# EAGLE board ToF-Module-panelized (EAGLE 9.4.2), part 1 of 3
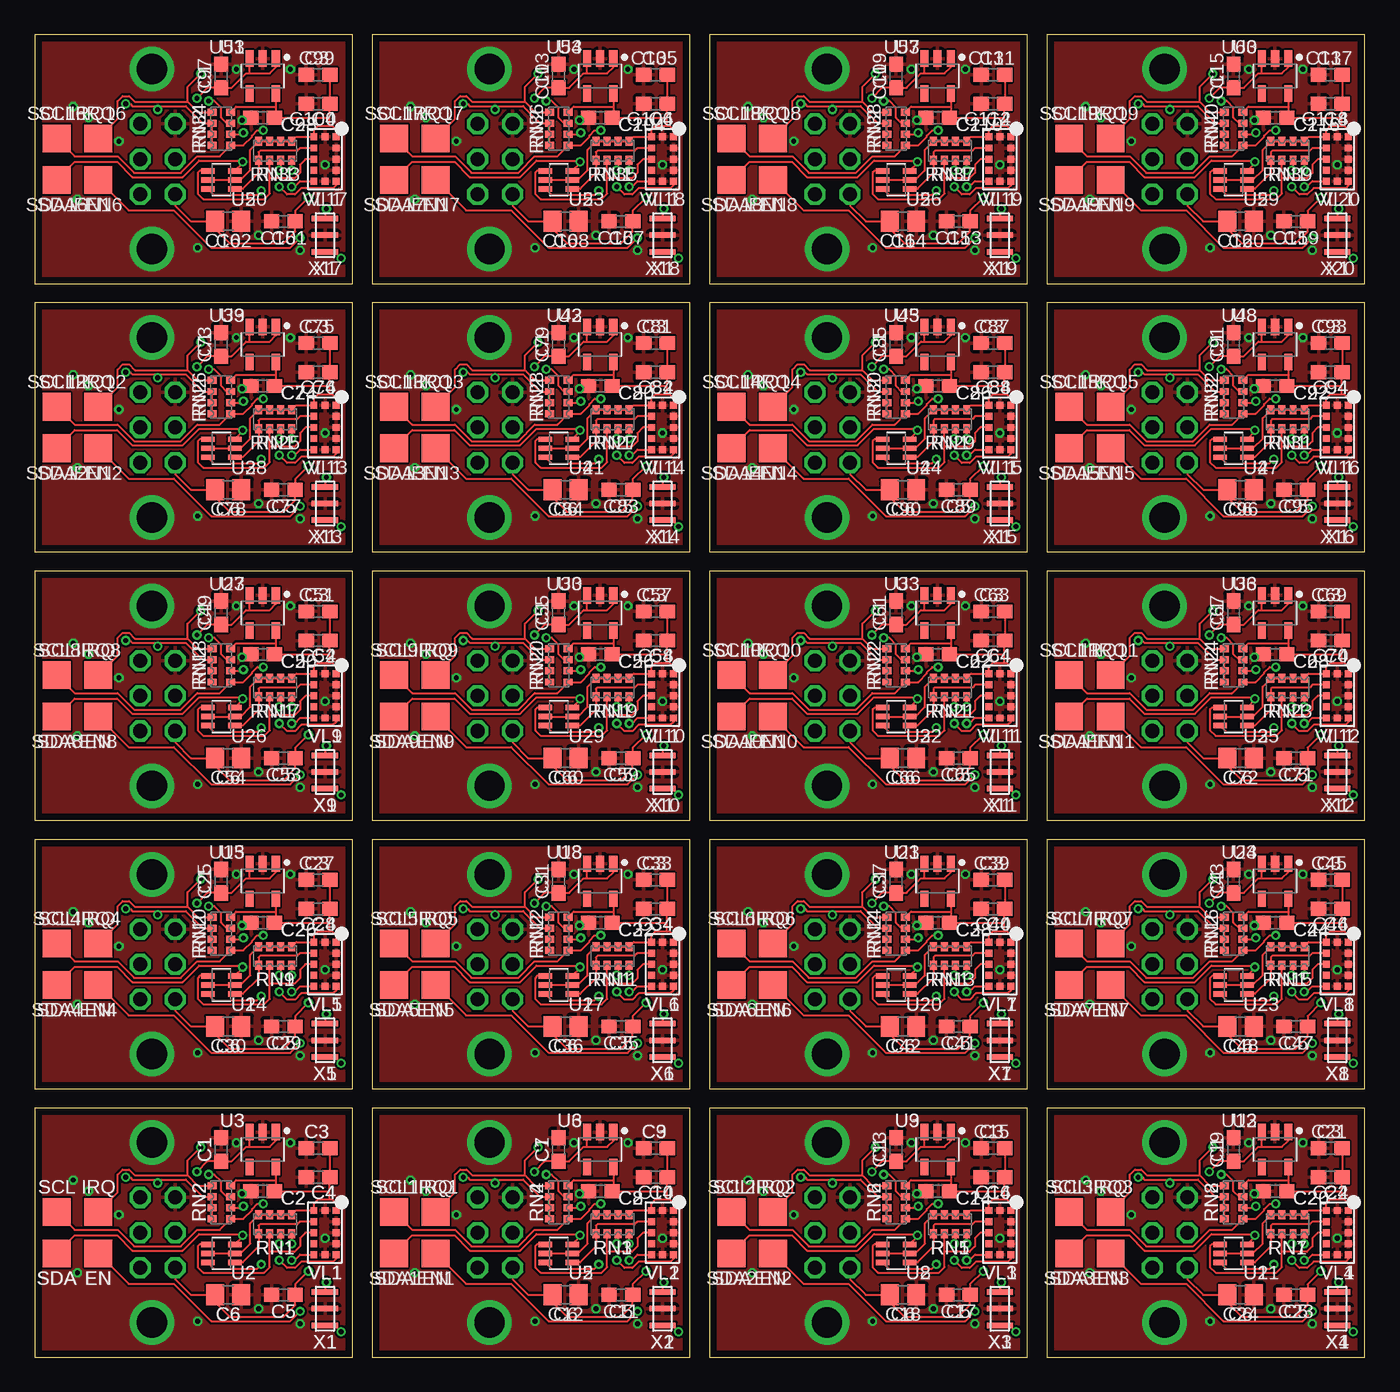
[diagram p0: board, top side]
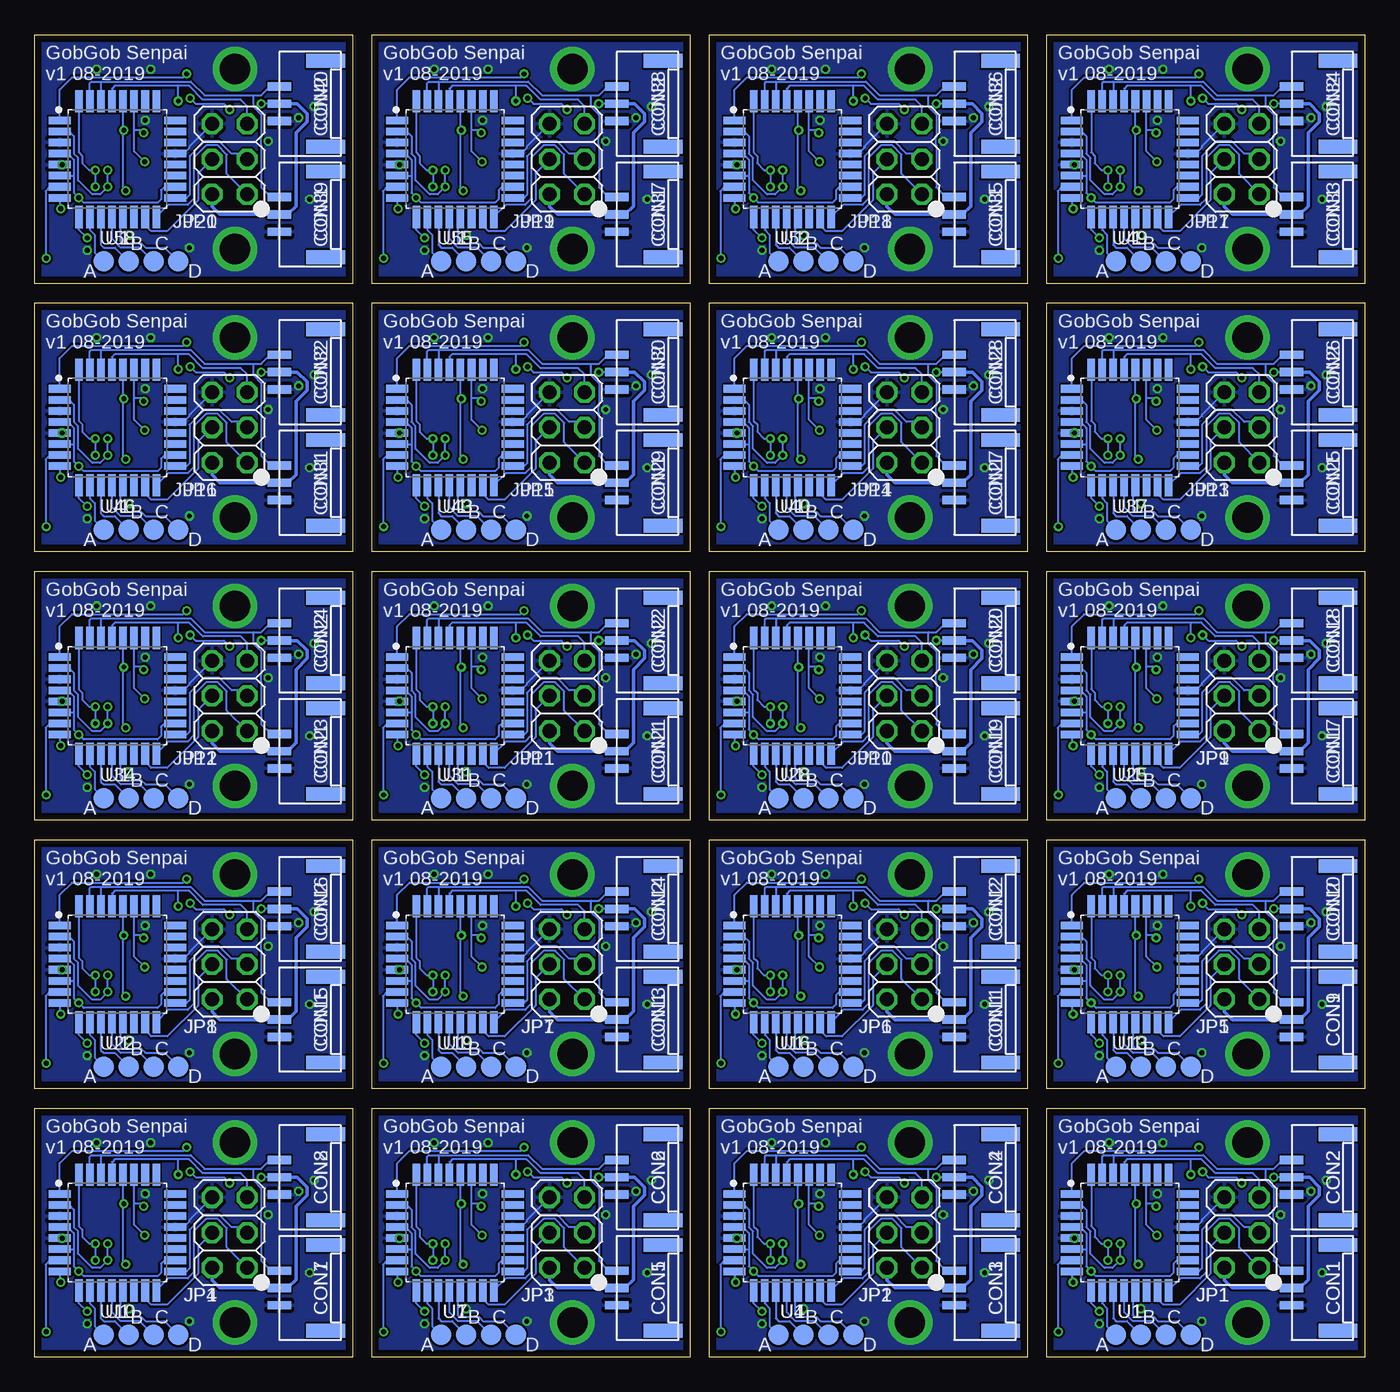
[diagram p1: board, bottom side, seen from below]

Size 96.2 x 95.6 mm. Coordinates in mm from the lower left corner, seen from the top.
Outline: 0,0 23,0 23,18 0,18 0,0
Outline: 24.4,0 47.4,0 47.4,18 24.4,18 24.4,0
Outline: 48.8,0 71.8,0 71.8,18 48.8,18 48.8,0
Outline: 73.2,0 96.2,0 96.2,18 73.2,18 73.2,0
Outline: 0,19.4 23,19.4 23,37.4 0,37.4 0,19.4
Outline: 24.4,19.4 47.4,19.4 47.4,37.4 24.4,37.4 24.4,19.4
Outline: 48.8,19.4 71.8,19.4 71.8,37.4 48.8,37.4 48.8,19.4
Outline: 73.2,19.4 96.2,19.4 96.2,37.4 73.2,37.4 73.2,19.4
Outline: 0,38.8 23,38.8 23,56.8 0,56.8 0,38.8
Outline: 24.4,38.8 47.4,38.8 47.4,56.8 24.4,56.8 24.4,38.8
Outline: 48.8,38.8 71.8,38.8 71.8,56.8 48.8,56.8 48.8,38.8
Outline: 73.2,38.8 96.2,38.8 96.2,56.8 73.2,56.8 73.2,38.8
Outline: 0,58.2 23,58.2 23,76.2 0,76.2 0,58.2
Outline: 24.4,58.2 47.4,58.2 47.4,76.2 24.4,76.2 24.4,58.2
Outline: 48.8,58.2 71.8,58.2 71.8,76.2 48.8,76.2 48.8,58.2
Outline: 73.2,58.2 96.2,58.2 96.2,76.2 73.2,76.2 73.2,58.2
Outline: 0,77.6 23,77.6 23,95.6 0,95.6 0,77.6
Outline: 24.4,77.6 47.4,77.6 47.4,95.6 24.4,95.6 24.4,77.6
Outline: 48.8,77.6 71.8,77.6 71.8,95.6 48.8,95.6 48.8,77.6
Outline: 73.2,77.6 96.2,77.6 96.2,95.6 73.2,95.6 73.2,77.6
Copper layers (1*16): Top 0.035mm / dielectric 1mm / Bottom 0.035mm
Design rules "Elecrow_2-layer_PCB_eagle_rule *": minimum track width 6mil, minimum drill 12mil, track to track 6mil, track to pad 6mil, pad to pad 6mil, via to via 8mil, smd to smd 0mil, copper to edge 20mil, drill to drill 10mil, minimum pad ring 6mil, minimum via ring 6mil, stop-mask expansion 0mil, vias tented up to drill 1mm, thermal gap 10mil
tKeepout: area 0,0 to 11,5; area 0,13 to 11,18; area 24.4,0 to 35.4,5; area 24.4,13 to 35.4,18; area 48.8,0 to 59.8,5; area 48.8,13 to 59.8,18; area 73.2,0 to 84.2,5; area 73.2,13 to 84.2,18; area 0,19.4 to 11,24.4; area 0,32.4 to 11,37.4; area 24.4,19.4 to 35.4,24.4; area 24.4,32.4 to 35.4,37.4; area 48.8,19.4 to 59.8,24.4; area 48.8,32.4 to 59.8,37.4; area 73.2,19.4 to 84.2,24.4; area 73.2,32.4 to 84.2,37.4; area 0,38.8 to 11,43.8; area 0,51.8 to 11,56.8; area 24.4,38.8 to 35.4,43.8; area 24.4,51.8 to 35.4,56.8; area 48.8,38.8 to 59.8,43.8; area 48.8,51.8 to 59.8,56.8; area 73.2,38.8 to 84.2,43.8; area 73.2,51.8 to 84.2,56.8; area 0,58.2 to 11,63.2; area 0,71.2 to 11,76.2; area 24.4,58.2 to 35.4,63.2; area 24.4,71.2 to 35.4,76.2; area 48.8,58.2 to 59.8,63.2; area 48.8,71.2 to 59.8,76.2; area 73.2,58.2 to 84.2,63.2; area 73.2,71.2 to 84.2,76.2; area 0,77.6 to 11,82.6; area 0,90.6 to 11,95.6; area 24.4,77.6 to 35.4,82.6; area 24.4,90.6 to 35.4,95.6; area 48.8,77.6 to 59.8,82.6; area 48.8,90.6 to 59.8,95.6; area 73.2,77.6 to 84.2,82.6; area 73.2,90.6 to 84.2,95.6
bKeepout: area 6,0 to 11,5; area 6,13 to 11,18; area 30.4,0 to 35.4,5; area 30.4,13 to 35.4,18; area 54.8,0 to 59.8,5; area 54.8,13 to 59.8,18; area 79.2,0 to 84.2,5; area 79.2,13 to 84.2,18; area 6,19.4 to 11,24.4; area 6,32.4 to 11,37.4; area 30.4,19.4 to 35.4,24.4; area 30.4,32.4 to 35.4,37.4; area 54.8,19.4 to 59.8,24.4; area 54.8,32.4 to 59.8,37.4; area 79.2,19.4 to 84.2,24.4; area 79.2,32.4 to 84.2,37.4; area 6,38.8 to 11,43.8; area 6,51.8 to 11,56.8; area 30.4,38.8 to 35.4,43.8; area 30.4,51.8 to 35.4,56.8; area 54.8,38.8 to 59.8,43.8; area 54.8,51.8 to 59.8,56.8; area 79.2,38.8 to 84.2,43.8; area 79.2,51.8 to 84.2,56.8; area 6,58.2 to 11,63.2; area 6,71.2 to 11,76.2; area 30.4,58.2 to 35.4,63.2; area 30.4,71.2 to 35.4,76.2; area 54.8,58.2 to 59.8,63.2; area 54.8,71.2 to 59.8,76.2; area 79.2,58.2 to 84.2,63.2; area 79.2,71.2 to 84.2,76.2; area 6,77.6 to 11,82.6; area 6,90.6 to 11,95.6; area 30.4,77.6 to 35.4,82.6; area 30.4,90.6 to 35.4,95.6; area 54.8,77.6 to 59.8,82.6; area 54.8,90.6 to 59.8,95.6; area 79.2,77.6 to 84.2,82.6; area 79.2,90.6 to 84.2,95.6

## Footprints (pad centres in the part's own frame; a part is rotated, then mirrored left to right if it is on the bottom)
C0603 = smd 1.1 x 1: 1 -0.85,0; 2 0.85,0
C0805 = smd 1.3 x 1.5: 1 -0.95,0; 2 0.95,0
GH-03-V = smd 0.6 x 1.7: 1 -1.25,2.5; 2 0,2.5; 3 1.25,2.5 | smd 1 x 2.8: CASE0 3.1,-0.85; CASE1 -3.1,-0.85
TP15R = smd 1.5 x 1.5: TP 0,0
TP20SQ = smd 2 x 2: TP 0,0
2X03 = drill 1.016 octagon: 1 -2.54,-1.27; 2 -2.54,1.27; 3 0,-1.27; 4 0,1.27; 5 2.54,-1.27; 6 2.54,1.27
CAT16 = smd 0.5 x 0.65: 1 -1.2,-0.675; 2 -0.4,-0.675; 3 0.4,-0.675; 4 1.2,-0.675; 5 1.2,0.675; 6 0.4,0.675; 7 -0.4,0.675; 8 -1.2,0.675
QFP80P900X900X120-32 = smd 1.6 x 0.547: 1 -4.181,2.8; 2 -4.181,2; 3 -4.181,1.2; 4 -4.181,0.4; 5 -4.181,-0.4; 6 -4.181,-1.2; 7 -4.181,-2; 8 -4.181,-2.8; 17 4.181,-2.8; 18 4.181,-2; 19 4.181,-1.2; 20 4.181,-0.4; 21 4.181,0.4; 22 4.181,1.2; 23 4.181,2; 24 4.181,2.8 | smd 0.547 x 1.6: 9 -2.8,-4.181; 10 -2,-4.181; 11 -1.2,-4.181; 12 -0.4,-4.181; 13 0.4,-4.181; 14 1.2,-4.181; 15 2,-4.181; 16 2.8,-4.181; 25 2.8,4.181; 26 2,4.181; 27 1.2,4.181; 28 0.4,4.181; 29 -0.4,4.181; 30 -1.2,4.181; 31 -2,4.181; 32 -2.8,4.181
SOT65P210X110-6 = smd 0.973 x 0.389: D1 -0.978,-0.65; D2 0.978,0.65; G1 0.978,0; G2 -0.978,0; S1 0.978,-0.65; S2 -0.978,0.65
SOT95P280X145-5 = smd 1.186 x 0.584: 1 -1.264,0.95; 2 -1.264,0; 3 -1.264,-0.95; 4 1.264,-0.95; 5 1.264,0.95
VL53L0X = smd 0.5 x 0.5: 1 1.6,-0.8; 2 0.8,-0.8; 3 0,-0.8; 4 -0.8,-0.8; 5 -1.6,-0.8; 6 -1.6,0; 7 -1.6,0.8; 8 -0.8,0.8; 9 0,0.8; 10 0.8,0.8; 11 1.6,0.8; 12 1.6,0
CSTNE = smd 0.4 x 1.9: 1 -1.2,0; 2 0,0; 3 1.2,0

## Placement (x,y rotation side)
C1  4.7µF  [C0603]  13.5,15 90 top
C2  4.7µF  [C0603]  16.5,12 180 top
C3  4.7µF  [C0603]  20.5,15.1 180 top
C4  0.1µF  [C0603]  20.5,13 180 top
C5  0.1µF  [C0603]  18,4.5 180 top
C6  10µF  [C0805]  14,4.5 0 top
C7  4.7µF  [C0603]  37.9,15 90 top
C8  4.7µF  [C0603]  40.9,12 180 top
C9  4.7µF  [C0603]  44.9,15.1 180 top
C10  0.1µF  [C0603]  44.9,13 180 top
C11  0.1µF  [C0603]  42.4,4.5 180 top
C12  10µF  [C0805]  38.4,4.5 0 top
C13  4.7µF  [C0603]  62.3,15 90 top
C14  4.7µF  [C0603]  65.3,12 180 top
C15  4.7µF  [C0603]  69.3,15.1 180 top
C16  0.1µF  [C0603]  69.3,13 180 top
C17  0.1µF  [C0603]  66.8,4.5 180 top
C18  10µF  [C0805]  62.8,4.5 0 top
C19  4.7µF  [C0603]  86.7,15 90 top
C20  4.7µF  [C0603]  89.7,12 180 top
C21  4.7µF  [C0603]  93.7,15.1 180 top
C22  0.1µF  [C0603]  93.7,13 180 top
C23  0.1µF  [C0603]  91.2,4.5 180 top
C24  10µF  [C0805]  87.2,4.5 0 top
C25  4.7µF  [C0603]  13.5,34.4 90 top
C26  4.7µF  [C0603]  16.5,31.4 180 top
C27  4.7µF  [C0603]  20.5,34.5 180 top
C28  0.1µF  [C0603]  20.5,32.4 180 top
C29  0.1µF  [C0603]  18,23.9 180 top
C30  10µF  [C0805]  14,23.9 0 top
C31  4.7µF  [C0603]  37.9,34.4 90 top
C32  4.7µF  [C0603]  40.9,31.4 180 top
C33  4.7µF  [C0603]  44.9,34.5 180 top
C34  0.1µF  [C0603]  44.9,32.4 180 top
C35  0.1µF  [C0603]  42.4,23.9 180 top
C36  10µF  [C0805]  38.4,23.9 0 top
C37  4.7µF  [C0603]  62.3,34.4 90 top
C38  4.7µF  [C0603]  65.3,31.4 180 top
C39  4.7µF  [C0603]  69.3,34.5 180 top
C40  0.1µF  [C0603]  69.3,32.4 180 top
C41  0.1µF  [C0603]  66.8,23.9 180 top
C42  10µF  [C0805]  62.8,23.9 0 top
C43  4.7µF  [C0603]  86.7,34.4 90 top
C44  4.7µF  [C0603]  89.7,31.4 180 top
C45  4.7µF  [C0603]  93.7,34.5 180 top
C46  0.1µF  [C0603]  93.7,32.4 180 top
C47  0.1µF  [C0603]  91.2,23.9 180 top
C48  10µF  [C0805]  87.2,23.9 0 top
C49  4.7µF  [C0603]  13.5,53.8 90 top
C50  4.7µF  [C0603]  16.5,50.8 180 top
C51  4.7µF  [C0603]  20.5,53.9 180 top
C52  0.1µF  [C0603]  20.5,51.8 180 top
C53  0.1µF  [C0603]  18,43.3 180 top
C54  10µF  [C0805]  14,43.3 0 top
C55  4.7µF  [C0603]  37.9,53.8 90 top
C56  4.7µF  [C0603]  40.9,50.8 180 top
C57  4.7µF  [C0603]  44.9,53.9 180 top
C58  0.1µF  [C0603]  44.9,51.8 180 top
C59  0.1µF  [C0603]  42.4,43.3 180 top
C60  10µF  [C0805]  38.4,43.3 0 top
C61  4.7µF  [C0603]  62.3,53.8 90 top
C62  4.7µF  [C0603]  65.3,50.8 180 top
C63  4.7µF  [C0603]  69.3,53.9 180 top
C64  0.1µF  [C0603]  69.3,51.8 180 top
C65  0.1µF  [C0603]  66.8,43.3 180 top
C66  10µF  [C0805]  62.8,43.3 0 top
C67  4.7µF  [C0603]  86.7,53.8 90 top
C68  4.7µF  [C0603]  89.7,50.8 180 top
C69  4.7µF  [C0603]  93.7,53.9 180 top
C70  0.1µF  [C0603]  93.7,51.8 180 top
C71  0.1µF  [C0603]  91.2,43.3 180 top
C72  10µF  [C0805]  87.2,43.3 0 top
C73  4.7µF  [C0603]  13.5,73.2 90 top
C74  4.7µF  [C0603]  16.5,70.2 180 top
C75  4.7µF  [C0603]  20.5,73.3 180 top
C76  0.1µF  [C0603]  20.5,71.2 180 top
C77  0.1µF  [C0603]  18,62.7 180 top
C78  10µF  [C0805]  14,62.7 0 top
C79  4.7µF  [C0603]  37.9,73.2 90 top
C80  4.7µF  [C0603]  40.9,70.2 180 top
C81  4.7µF  [C0603]  44.9,73.3 180 top
C82  0.1µF  [C0603]  44.9,71.2 180 top
C83  0.1µF  [C0603]  42.4,62.7 180 top
C84  10µF  [C0805]  38.4,62.7 0 top
C85  4.7µF  [C0603]  62.3,73.2 90 top
C86  4.7µF  [C0603]  65.3,70.2 180 top
C87  4.7µF  [C0603]  69.3,73.3 180 top
C88  0.1µF  [C0603]  69.3,71.2 180 top
C89  0.1µF  [C0603]  66.8,62.7 180 top
C90  10µF  [C0805]  62.8,62.7 0 top
C91  4.7µF  [C0603]  86.7,73.2 90 top
C92  4.7µF  [C0603]  89.7,70.2 180 top
C93  4.7µF  [C0603]  93.7,73.3 180 top
C94  0.1µF  [C0603]  93.7,71.2 180 top
C95  0.1µF  [C0603]  91.2,62.7 180 top
C96  10µF  [C0805]  87.2,62.7 0 top
C97  4.7µF  [C0603]  13.5,92.6 90 top
C98  4.7µF  [C0603]  16.5,89.6 180 top
C99  4.7µF  [C0603]  20.5,92.7 180 top
C100  0.1µF  [C0603]  20.5,90.6 180 top
C101  0.1µF  [C0603]  18,82.1 180 top
C102  10µF  [C0805]  14,82.1 0 top
C103  4.7µF  [C0603]  37.9,92.6 90 top
C104  4.7µF  [C0603]  40.9,89.6 180 top
C105  4.7µF  [C0603]  44.9,92.7 180 top
C106  0.1µF  [C0603]  44.9,90.6 180 top
C107  0.1µF  [C0603]  42.4,82.1 180 top
C108  10µF  [C0805]  38.4,82.1 0 top
C109  4.7µF  [C0603]  62.3,92.6 90 top
C110  4.7µF  [C0603]  65.3,89.6 180 top
C111  4.7µF  [C0603]  69.3,92.7 180 top
C112  0.1µF  [C0603]  69.3,90.6 180 top
C113  0.1µF  [C0603]  66.8,82.1 180 top
C114  10µF  [C0805]  62.8,82.1 0 top
C115  4.7µF  [C0603]  86.7,92.6 90 top
C116  4.7µF  [C0603]  89.7,89.6 180 top
C117  4.7µF  [C0603]  93.7,92.7 180 top
C118  0.1µF  [C0603]  93.7,90.6 180 top
C119  0.1µF  [C0603]  91.2,82.1 180 top
C120  10µF  [C0805]  87.2,82.1 0 top
CON1  JST-03  [GH-03-V]  2.8,5 90 bottom
CON2  JST-03  [GH-03-V]  2.8,13 90 bottom
CON3  JST-03  [GH-03-V]  27.2,5 90 bottom
CON4  JST-03  [GH-03-V]  27.2,13 90 bottom
CON5  JST-03  [GH-03-V]  51.6,5 90 bottom
CON6  JST-03  [GH-03-V]  51.6,13 90 bottom
CON7  JST-03  [GH-03-V]  76,5 90 bottom
CON8  JST-03  [GH-03-V]  76,13 90 bottom
CON9  JST-03  [GH-03-V]  2.8,24.4 90 bottom
CON10  JST-03  [GH-03-V]  2.8,32.4 90 bottom
CON11  JST-03  [GH-03-V]  27.2,24.4 90 bottom
CON12  JST-03  [GH-03-V]  27.2,32.4 90 bottom
CON13  JST-03  [GH-03-V]  51.6,24.4 90 bottom
CON14  JST-03  [GH-03-V]  51.6,32.4 90 bottom
CON15  JST-03  [GH-03-V]  76,24.4 90 bottom
CON16  JST-03  [GH-03-V]  76,32.4 90 bottom
CON17  JST-03  [GH-03-V]  2.8,43.8 90 bottom
CON18  JST-03  [GH-03-V]  2.8,51.8 90 bottom
CON19  JST-03  [GH-03-V]  27.2,43.8 90 bottom
CON20  JST-03  [GH-03-V]  27.2,51.8 90 bottom
CON21  JST-03  [GH-03-V]  51.6,43.8 90 bottom
CON22  JST-03  [GH-03-V]  51.6,51.8 90 bottom
CON23  JST-03  [GH-03-V]  76,43.8 90 bottom
CON24  JST-03  [GH-03-V]  76,51.8 90 bottom
CON25  JST-03  [GH-03-V]  2.8,63.2 90 bottom
CON26  JST-03  [GH-03-V]  2.8,71.2 90 bottom
CON27  JST-03  [GH-03-V]  27.2,63.2 90 bottom
CON28  JST-03  [GH-03-V]  27.2,71.2 90 bottom
CON29  JST-03  [GH-03-V]  51.6,63.2 90 bottom
CON30  JST-03  [GH-03-V]  51.6,71.2 90 bottom
CON31  JST-03  [GH-03-V]  76,63.2 90 bottom
CON32  JST-03  [GH-03-V]  76,71.2 90 bottom
CON33  JST-03  [GH-03-V]  2.8,82.6 90 bottom
CON34  JST-03  [GH-03-V]  2.8,90.6 90 bottom
CON35  JST-03  [GH-03-V]  27.2,82.6 90 bottom
CON36  JST-03  [GH-03-V]  27.2,90.6 90 bottom
CON37  JST-03  [GH-03-V]  51.6,82.6 90 bottom
CON38  JST-03  [GH-03-V]  51.6,90.6 90 bottom
CON39  JST-03  [GH-03-V]  76,82.6 90 bottom
CON40  JST-03  [GH-03-V]  76,90.6 90 bottom
DEBUG_A  PTR1TP15R  [TP15R]  18,1.6 0 bottom
DEBUG_A1  PTR1TP15R  [TP15R]  42.4,1.6 0 bottom
DEBUG_A2  PTR1TP15R  [TP15R]  66.8,1.6 0 bottom
DEBUG_A3  PTR1TP15R  [TP15R]  91.2,1.6 0 bottom
DEBUG_A4  PTR1TP15R  [TP15R]  18,21 0 bottom
DEBUG_A5  PTR1TP15R  [TP15R]  42.4,21 0 bottom
DEBUG_A6  PTR1TP15R  [TP15R]  66.8,21 0 bottom
DEBUG_A7  PTR1TP15R  [TP15R]  91.2,21 0 bottom
DEBUG_A8  PTR1TP15R  [TP15R]  18,40.4 0 bottom
DEBUG_A9  PTR1TP15R  [TP15R]  42.4,40.4 0 bottom
DEBUG_A10  PTR1TP15R  [TP15R]  66.8,40.4 0 bottom
DEBUG_A11  PTR1TP15R  [TP15R]  91.2,40.4 0 bottom
DEBUG_A12  PTR1TP15R  [TP15R]  18,59.8 0 bottom
DEBUG_A13  PTR1TP15R  [TP15R]  42.4,59.8 0 bottom
DEBUG_A14  PTR1TP15R  [TP15R]  66.8,59.8 0 bottom
DEBUG_A15  PTR1TP15R  [TP15R]  91.2,59.8 0 bottom
DEBUG_A16  PTR1TP15R  [TP15R]  18,79.2 0 bottom
DEBUG_A17  PTR1TP15R  [TP15R]  42.4,79.2 0 bottom
DEBUG_A18  PTR1TP15R  [TP15R]  66.8,79.2 0 bottom
DEBUG_A19  PTR1TP15R  [TP15R]  91.2,79.2 0 bottom
DEBUG_B  PTR1TP15R  [TP15R]  16.2,1.6 0 bottom
DEBUG_B1  PTR1TP15R  [TP15R]  40.6,1.6 0 bottom
DEBUG_B2  PTR1TP15R  [TP15R]  65,1.6 0 bottom
DEBUG_B3  PTR1TP15R  [TP15R]  89.4,1.6 0 bottom
DEBUG_B4  PTR1TP15R  [TP15R]  16.2,21 0 bottom
DEBUG_B5  PTR1TP15R  [TP15R]  40.6,21 0 bottom
DEBUG_B6  PTR1TP15R  [TP15R]  65,21 0 bottom
DEBUG_B7  PTR1TP15R  [TP15R]  89.4,21 0 bottom
DEBUG_B8  PTR1TP15R  [TP15R]  16.2,40.4 0 bottom
DEBUG_B9  PTR1TP15R  [TP15R]  40.6,40.4 0 bottom
DEBUG_B10  PTR1TP15R  [TP15R]  65,40.4 0 bottom
DEBUG_B11  PTR1TP15R  [TP15R]  89.4,40.4 0 bottom
DEBUG_B12  PTR1TP15R  [TP15R]  16.2,59.8 0 bottom
DEBUG_B13  PTR1TP15R  [TP15R]  40.6,59.8 0 bottom
DEBUG_B14  PTR1TP15R  [TP15R]  65,59.8 0 bottom
DEBUG_B15  PTR1TP15R  [TP15R]  89.4,59.8 0 bottom
DEBUG_B16  PTR1TP15R  [TP15R]  16.2,79.2 0 bottom
DEBUG_B17  PTR1TP15R  [TP15R]  40.6,79.2 0 bottom
DEBUG_B18  PTR1TP15R  [TP15R]  65,79.2 0 bottom
DEBUG_B19  PTR1TP15R  [TP15R]  89.4,79.2 0 bottom
DEBUG_C  PTR1TP15R  [TP15R]  14.4,1.6 0 bottom
DEBUG_C1  PTR1TP15R  [TP15R]  38.8,1.6 0 bottom
DEBUG_C2  PTR1TP15R  [TP15R]  63.2,1.6 0 bottom
DEBUG_C3  PTR1TP15R  [TP15R]  87.6,1.6 0 bottom
DEBUG_C4  PTR1TP15R  [TP15R]  14.4,21 0 bottom
DEBUG_C5  PTR1TP15R  [TP15R]  38.8,21 0 bottom
DEBUG_C6  PTR1TP15R  [TP15R]  63.2,21 0 bottom
DEBUG_C7  PTR1TP15R  [TP15R]  87.6,21 0 bottom
DEBUG_C8  PTR1TP15R  [TP15R]  14.4,40.4 0 bottom
DEBUG_C9  PTR1TP15R  [TP15R]  38.8,40.4 0 bottom
DEBUG_C10  PTR1TP15R  [TP15R]  63.2,40.4 0 bottom
DEBUG_C11  PTR1TP15R  [TP15R]  87.6,40.4 0 bottom
DEBUG_C12  PTR1TP15R  [TP15R]  14.4,59.8 0 bottom
DEBUG_C13  PTR1TP15R  [TP15R]  38.8,59.8 0 bottom
DEBUG_C14  PTR1TP15R  [TP15R]  63.2,59.8 0 bottom
DEBUG_C15  PTR1TP15R  [TP15R]  87.6,59.8 0 bottom
DEBUG_C16  PTR1TP15R  [TP15R]  14.4,79.2 0 bottom
DEBUG_C17  PTR1TP15R  [TP15R]  38.8,79.2 0 bottom
DEBUG_C18  PTR1TP15R  [TP15R]  63.2,79.2 0 bottom
DEBUG_C19  PTR1TP15R  [TP15R]  87.6,79.2 0 bottom
DEBUG_D  PTR1TP15R  [TP15R]  12.6,1.6 0 bottom
DEBUG_D1  PTR1TP15R  [TP15R]  37,1.6 0 bottom
DEBUG_D2  PTR1TP15R  [TP15R]  61.4,1.6 0 bottom
DEBUG_D3  PTR1TP15R  [TP15R]  85.8,1.6 0 bottom
DEBUG_D4  PTR1TP15R  [TP15R]  12.6,21 0 bottom
DEBUG_D5  PTR1TP15R  [TP15R]  37,21 0 bottom
DEBUG_D6  PTR1TP15R  [TP15R]  61.4,21 0 bottom
DEBUG_D7  PTR1TP15R  [TP15R]  85.8,21 0 bottom
DEBUG_D8  PTR1TP15R  [TP15R]  12.6,40.4 0 bottom
DEBUG_D9  PTR1TP15R  [TP15R]  37,40.4 0 bottom
DEBUG_D10  PTR1TP15R  [TP15R]  61.4,40.4 0 bottom
DEBUG_D11  PTR1TP15R  [TP15R]  85.8,40.4 0 bottom
DEBUG_D12  PTR1TP15R  [TP15R]  12.6,59.8 0 bottom
DEBUG_D13  PTR1TP15R  [TP15R]  37,59.8 0 bottom
DEBUG_D14  PTR1TP15R  [TP15R]  61.4,59.8 0 bottom
DEBUG_D15  PTR1TP15R  [TP15R]  85.8,59.8 0 bottom
DEBUG_D16  PTR1TP15R  [TP15R]  12.6,79.2 0 bottom
DEBUG_D17  PTR1TP15R  [TP15R]  37,79.2 0 bottom
DEBUG_D18  PTR1TP15R  [TP15R]  61.4,79.2 0 bottom
DEBUG_D19  PTR1TP15R  [TP15R]  85.8,79.2 0 bottom
EN  PTR1TP20SQ  [TP20SQ]  4.6,7.5 0 top
EN1  PTR1TP20SQ  [TP20SQ]  29,7.5 0 top
EN2  PTR1TP20SQ  [TP20SQ]  53.4,7.5 0 top
EN3  PTR1TP20SQ  [TP20SQ]  77.8,7.5 0 top
EN4  PTR1TP20SQ  [TP20SQ]  4.6,26.9 0 top
EN5  PTR1TP20SQ  [TP20SQ]  29,26.9 0 top
EN6  PTR1TP20SQ  [TP20SQ]  53.4,26.9 0 top
EN7  PTR1TP20SQ  [TP20SQ]  77.8,26.9 0 top
EN8  PTR1TP20SQ  [TP20SQ]  4.6,46.3 0 top
EN9  PTR1TP20SQ  [TP20SQ]  29,46.3 0 top
EN10  PTR1TP20SQ  [TP20SQ]  53.4,46.3 0 top
EN11  PTR1TP20SQ  [TP20SQ]  77.8,46.3 0 top
EN12  PTR1TP20SQ  [TP20SQ]  4.6,65.7 0 top
EN13  PTR1TP20SQ  [TP20SQ]  29,65.7 0 top
EN14  PTR1TP20SQ  [TP20SQ]  53.4,65.7 0 top
EN15  PTR1TP20SQ  [TP20SQ]  77.8,65.7 0 top
EN16  PTR1TP20SQ  [TP20SQ]  4.6,85.1 0 top
EN17  PTR1TP20SQ  [TP20SQ]  29,85.1 0 top
EN18  PTR1TP20SQ  [TP20SQ]  53.4,85.1 0 top
EN19  PTR1TP20SQ  [TP20SQ]  77.8,85.1 0 top
IRQ  PTR1TP20SQ  [TP20SQ]  4.6,10.5 0 top
IRQ1  PTR1TP20SQ  [TP20SQ]  29,10.5 0 top
IRQ2  PTR1TP20SQ  [TP20SQ]  53.4,10.5 0 top
IRQ3  PTR1TP20SQ  [TP20SQ]  77.8,10.5 0 top
IRQ4  PTR1TP20SQ  [TP20SQ]  4.6,29.9 0 top
IRQ5  PTR1TP20SQ  [TP20SQ]  29,29.9 0 top
IRQ6  PTR1TP20SQ  [TP20SQ]  53.4,29.9 0 top
IRQ7  PTR1TP20SQ  [TP20SQ]  77.8,29.9 0 top
IRQ8  PTR1TP20SQ  [TP20SQ]  4.6,49.3 0 top
IRQ9  PTR1TP20SQ  [TP20SQ]  29,49.3 0 top
IRQ10  PTR1TP20SQ  [TP20SQ]  53.4,49.3 0 top
IRQ11  PTR1TP20SQ  [TP20SQ]  77.8,49.3 0 top
IRQ12  PTR1TP20SQ  [TP20SQ]  4.6,68.7 0 top
IRQ13  PTR1TP20SQ  [TP20SQ]  29,68.7 0 top
IRQ14  PTR1TP20SQ  [TP20SQ]  53.4,68.7 0 top
IRQ15  PTR1TP20SQ  [TP20SQ]  77.8,68.7 0 top
IRQ16  PTR1TP20SQ  [TP20SQ]  4.6,88.1 0 top
IRQ17  PTR1TP20SQ  [TP20SQ]  29,88.1 0 top
IRQ18  PTR1TP20SQ  [TP20SQ]  53.4,88.1 0 top
IRQ19  PTR1TP20SQ  [TP20SQ]  77.8,88.1 0 top
JP1  ICSP  [2X03]  8.9,9 90 bottom
JP2  ICSP  [2X03]  33.3,9 90 bottom
JP3  ICSP  [2X03]  57.7,9 90 bottom
JP4  ICSP  [2X03]  82.1,9 90 bottom
JP5  ICSP  [2X03]  8.9,28.4 90 bottom
JP6  ICSP  [2X03]  33.3,28.4 90 bottom
JP7  ICSP  [2X03]  57.7,28.4 90 bottom
JP8  ICSP  [2X03]  82.1,28.4 90 bottom
JP9  ICSP  [2X03]  8.9,47.8 90 bottom
JP10  ICSP  [2X03]  33.3,47.8 90 bottom
JP11  ICSP  [2X03]  57.7,47.8 90 bottom
JP12  ICSP  [2X03]  82.1,47.8 90 bottom
JP13  ICSP  [2X03]  8.9,67.2 90 bottom
JP14  ICSP  [2X03]  33.3,67.2 90 bottom
JP15  ICSP  [2X03]  57.7,67.2 90 bottom
JP16  ICSP  [2X03]  82.1,67.2 90 bottom
JP17  ICSP  [2X03]  8.9,86.6 90 bottom
JP18  ICSP  [2X03]  33.3,86.6 90 bottom
JP19  ICSP  [2X03]  57.7,86.6 90 bottom
JP20  ICSP  [2X03]  82.1,86.6 90 bottom
RN1  10k  [CAT16]  17.4,9.6 0 top
RN2  10k  [CAT16]  13.5,11.2 90 top
RN3  10k  [CAT16]  41.8,9.6 0 top
RN4  10k  [CAT16]  37.9,11.2 90 top
RN5  10k  [CAT16]  66.2,9.6 0 top
RN6  10k  [CAT16]  62.3,11.2 90 top
RN7  10k  [CAT16]  90.6,9.6 0 top
RN8  10k  [CAT16]  86.7,11.2 90 top
RN9  10k  [CAT16]  17.4,29 0 top
RN10  10k  [CAT16]  13.5,30.6 90 top
RN11  10k  [CAT16]  41.8,29 0 top
RN12  10k  [CAT16]  37.9,30.6 90 top
RN13  10k  [CAT16]  66.2,29 0 top
RN14  10k  [CAT16]  62.3,30.6 90 top
RN15  10k  [CAT16]  90.6,29 0 top
RN16  10k  [CAT16]  86.7,30.6 90 top
RN17  10k  [CAT16]  17.4,48.4 0 top
RN18  10k  [CAT16]  13.5,50 90 top
RN19  10k  [CAT16]  41.8,48.4 0 top
RN20  10k  [CAT16]  37.9,50 90 top
RN21  10k  [CAT16]  66.2,48.4 0 top
RN22  10k  [CAT16]  62.3,50 90 top
RN23  10k  [CAT16]  90.6,48.4 0 top
RN24  10k  [CAT16]  86.7,50 90 top
RN25  10k  [CAT16]  17.4,67.8 0 top
RN26  10k  [CAT16]  13.5,69.4 90 top
RN27  10k  [CAT16]  41.8,67.8 0 top
RN28  10k  [CAT16]  37.9,69.4 90 top
RN29  10k  [CAT16]  66.2,67.8 0 top
RN30  10k  [CAT16]  62.3,69.4 90 top
RN31  10k  [CAT16]  90.6,67.8 0 top
RN32  10k  [CAT16]  86.7,69.4 90 top
RN33  10k  [CAT16]  17.4,87.2 0 top
RN34  10k  [CAT16]  13.5,88.8 90 top
RN35  10k  [CAT16]  41.8,87.2 0 top
RN36  10k  [CAT16]  37.9,88.8 90 top
RN37  10k  [CAT16]  66.2,87.2 0 top
RN38  10k  [CAT16]  62.3,88.8 90 top
RN39  10k  [CAT16]  90.6,87.2 0 top
RN40  10k  [CAT16]  86.7,88.8 90 top
SCL  PTR1TP20SQ  [TP20SQ]  1.6,10.5 0 top
SCL1  PTR1TP20SQ  [TP20SQ]  26,10.5 0 top
SCL2  PTR1TP20SQ  [TP20SQ]  50.4,10.5 0 top
SCL3  PTR1TP20SQ  [TP20SQ]  74.8,10.5 0 top
SCL4  PTR1TP20SQ  [TP20SQ]  1.6,29.9 0 top
SCL5  PTR1TP20SQ  [TP20SQ]  26,29.9 0 top
SCL6  PTR1TP20SQ  [TP20SQ]  50.4,29.9 0 top
SCL7  PTR1TP20SQ  [TP20SQ]  74.8,29.9 0 top
SCL8  PTR1TP20SQ  [TP20SQ]  1.6,49.3 0 top
SCL9  PTR1TP20SQ  [TP20SQ]  26,49.3 0 top
SCL10  PTR1TP20SQ  [TP20SQ]  50.4,49.3 0 top
SCL11  PTR1TP20SQ  [TP20SQ]  74.8,49.3 0 top
SCL12  PTR1TP20SQ  [TP20SQ]  1.6,68.7 0 top
SCL13  PTR1TP20SQ  [TP20SQ]  26,68.7 0 top
SCL14  PTR1TP20SQ  [TP20SQ]  50.4,68.7 0 top
SCL15  PTR1TP20SQ  [TP20SQ]  74.8,68.7 0 top
SCL16  PTR1TP20SQ  [TP20SQ]  1.6,88.1 0 top
SCL17  PTR1TP20SQ  [TP20SQ]  26,88.1 0 top
SCL18  PTR1TP20SQ  [TP20SQ]  50.4,88.1 0 top
SCL19  PTR1TP20SQ  [TP20SQ]  74.8,88.1 0 top
SDA  PTR1TP20SQ  [TP20SQ]  1.6,7.5 0 top
SDA1  PTR1TP20SQ  [TP20SQ]  26,7.5 0 top
SDA2  PTR1TP20SQ  [TP20SQ]  50.4,7.5 0 top
SDA3  PTR1TP20SQ  [TP20SQ]  74.8,7.5 0 top
SDA4  PTR1TP20SQ  [TP20SQ]  1.6,26.9 0 top
SDA5  PTR1TP20SQ  [TP20SQ]  26,26.9 0 top
SDA6  PTR1TP20SQ  [TP20SQ]  50.4,26.9 0 top
SDA7  PTR1TP20SQ  [TP20SQ]  74.8,26.9 0 top
SDA8  PTR1TP20SQ  [TP20SQ]  1.6,46.3 0 top
SDA9  PTR1TP20SQ  [TP20SQ]  26,46.3 0 top
SDA10  PTR1TP20SQ  [TP20SQ]  50.4,46.3 0 top
SDA11  PTR1TP20SQ  [TP20SQ]  74.8,46.3 0 top
SDA12  PTR1TP20SQ  [TP20SQ]  1.6,65.7 0 top
SDA13  PTR1TP20SQ  [TP20SQ]  26,65.7 0 top
SDA14  PTR1TP20SQ  [TP20SQ]  50.4,65.7 0 top
SDA15  PTR1TP20SQ  [TP20SQ]  74.8,65.7 0 top
SDA16  PTR1TP20SQ  [TP20SQ]  1.6,85.1 0 top
SDA17  PTR1TP20SQ  [TP20SQ]  26,85.1 0 top
SDA18  PTR1TP20SQ  [TP20SQ]  50.4,85.1 0 top
SDA19  PTR1TP20SQ  [TP20SQ]  74.8,85.1 0 top
U1  ATMEGA328P  [QFP80P900X900X120-32]  17,9 0 bottom
U2  BSS138DWQ  [SOT65P210X110-6]  13.5,7.5 180 top
U3  MIC5504_2.8YM5  [SOT95P280X145-5]  16.5,15 270 top
U4  ATMEGA328P  [QFP80P900X900X120-32]  41.4,9 0 bottom
U5  BSS138DWQ  [SOT65P210X110-6]  37.9,7.5 180 top
U6  MIC5504_2.8YM5  [SOT95P280X145-5]  40.9,15 270 top
U7  ATMEGA328P  [QFP80P900X900X120-32]  65.8,9 0 bottom
U8  BSS138DWQ  [SOT65P210X110-6]  62.3,7.5 180 top
U9  MIC5504_2.8YM5  [SOT95P280X145-5]  65.3,15 270 top
U10  ATMEGA328P  [QFP80P900X900X120-32]  90.2,9 0 bottom
U11  BSS138DWQ  [SOT65P210X110-6]  86.7,7.5 180 top
U12  MIC5504_2.8YM5  [SOT95P280X145-5]  89.7,15 270 top
U13  ATMEGA328P  [QFP80P900X900X120-32]  17,28.4 0 bottom
U14  BSS138DWQ  [SOT65P210X110-6]  13.5,26.9 180 top
U15  MIC5504_2.8YM5  [SOT95P280X145-5]  16.5,34.4 270 top
U16  ATMEGA328P  [QFP80P900X900X120-32]  41.4,28.4 0 bottom
U17  BSS138DWQ  [SOT65P210X110-6]  37.9,26.9 180 top
U18  MIC5504_2.8YM5  [SOT95P280X145-5]  40.9,34.4 270 top
U19  ATMEGA328P  [QFP80P900X900X120-32]  65.8,28.4 0 bottom
U20  BSS138DWQ  [SOT65P210X110-6]  62.3,26.9 180 top
U21  MIC5504_2.8YM5  [SOT95P280X145-5]  65.3,34.4 270 top
U22  ATMEGA328P  [QFP80P900X900X120-32]  90.2,28.4 0 bottom
U23  BSS138DWQ  [SOT65P210X110-6]  86.7,26.9 180 top
U24  MIC5504_2.8YM5  [SOT95P280X145-5]  89.7,34.4 270 top
U25  ATMEGA328P  [QFP80P900X900X120-32]  17,47.8 0 bottom
U26  BSS138DWQ  [SOT65P210X110-6]  13.5,46.3 180 top
U27  MIC5504_2.8YM5  [SOT95P280X145-5]  16.5,53.8 270 top
U28  ATMEGA328P  [QFP80P900X900X120-32]  41.4,47.8 0 bottom
U29  BSS138DWQ  [SOT65P210X110-6]  37.9,46.3 180 top
U30  MIC5504_2.8YM5  [SOT95P280X145-5]  40.9,53.8 270 top
U31  ATMEGA328P  [QFP80P900X900X120-32]  65.8,47.8 0 bottom
U32  BSS138DWQ  [SOT65P210X110-6]  62.3,46.3 180 top
U33  MIC5504_2.8YM5  [SOT95P280X145-5]  65.3,53.8 270 top
U34  ATMEGA328P  [QFP80P900X900X120-32]  90.2,47.8 0 bottom
U35  BSS138DWQ  [SOT65P210X110-6]  86.7,46.3 180 top
U36  MIC5504_2.8YM5  [SOT95P280X145-5]  89.7,53.8 270 top
U37  ATMEGA328P  [QFP80P900X900X120-32]  17,67.2 0 bottom
U38  BSS138DWQ  [SOT65P210X110-6]  13.5,65.7 180 top
U39  MIC5504_2.8YM5  [SOT95P280X145-5]  16.5,73.2 270 top
U40  ATMEGA328P  [QFP80P900X900X120-32]  41.4,67.2 0 bottom
U41  BSS138DWQ  [SOT65P210X110-6]  37.9,65.7 180 top
U42  MIC5504_2.8YM5  [SOT95P280X145-5]  40.9,73.2 270 top
U43  ATMEGA328P  [QFP80P900X900X120-32]  65.8,67.2 0 bottom
U44  BSS138DWQ  [SOT65P210X110-6]  62.3,65.7 180 top
U45  MIC5504_2.8YM5  [SOT95P280X145-5]  65.3,73.2 270 top
U46  ATMEGA328P  [QFP80P900X900X120-32]  90.2,67.2 0 bottom
U47  BSS138DWQ  [SOT65P210X110-6]  86.7,65.7 180 top
U48  MIC5504_2.8YM5  [SOT95P280X145-5]  89.7,73.2 270 top
U49  ATMEGA328P  [QFP80P900X900X120-32]  17,86.6 0 bottom
U50  BSS138DWQ  [SOT65P210X110-6]  13.5,85.1 180 top
U51  MIC5504_2.8YM5  [SOT95P280X145-5]  16.5,92.6 270 top
U52  ATMEGA328P  [QFP80P900X900X120-32]  41.4,86.6 0 bottom
U53  BSS138DWQ  [SOT65P210X110-6]  37.9,85.1 180 top
U54  MIC5504_2.8YM5  [SOT95P280X145-5]  40.9,92.6 270 top
U55  ATMEGA328P  [QFP80P900X900X120-32]  65.8,86.6 0 bottom
U56  BSS138DWQ  [SOT65P210X110-6]  62.3,85.1 180 top
U57  MIC5504_2.8YM5  [SOT95P280X145-5]  65.3,92.6 270 top
U58  ATMEGA328P  [QFP80P900X900X120-32]  90.2,86.6 0 bottom
U59  BSS138DWQ  [SOT65P210X110-6]  86.7,85.1 180 top
U60  MIC5504_2.8YM5  [SOT95P280X145-5]  89.7,92.6 270 top
VL1  VL53L0X  [VL53L0X]  21,9 90 top
VL2  VL53L0X  [VL53L0X]  45.4,9 90 top
VL3  VL53L0X  [VL53L0X]  69.8,9 90 top
VL4  VL53L0X  [VL53L0X]  94.2,9 90 top
VL5  VL53L0X  [VL53L0X]  21,28.4 90 top
VL6  VL53L0X  [VL53L0X]  45.4,28.4 90 top
VL7  VL53L0X  [VL53L0X]  69.8,28.4 90 top
VL8  VL53L0X  [VL53L0X]  94.2,28.4 90 top
VL9  VL53L0X  [VL53L0X]  21,47.8 90 top
VL10  VL53L0X  [VL53L0X]  45.4,47.8 90 top
VL11  VL53L0X  [VL53L0X]  69.8,47.8 90 top
VL12  VL53L0X  [VL53L0X]  94.2,47.8 90 top
VL13  VL53L0X  [VL53L0X]  21,67.2 90 top
VL14  VL53L0X  [VL53L0X]  45.4,67.2 90 top
VL15  VL53L0X  [VL53L0X]  69.8,67.2 90 top
VL16  VL53L0X  [VL53L0X]  94.2,67.2 90 top
VL17  VL53L0X  [VL53L0X]  21,86.6 90 top
VL18  VL53L0X  [VL53L0X]  45.4,86.6 90 top
VL19  VL53L0X  [VL53L0X]  69.8,86.6 90 top
VL20  VL53L0X  [VL53L0X]  94.2,86.6 90 top
X1  RESONATOR8M00  [CSTNE]  21,3.5 90 top
X2  RESONATOR8M00  [CSTNE]  45.4,3.5 90 top
X3  RESONATOR8M00  [CSTNE]  69.8,3.5 90 top
X4  RESONATOR8M00  [CSTNE]  94.2,3.5 90 top
X5  RESONATOR8M00  [CSTNE]  21,22.9 90 top
X6  RESONATOR8M00  [CSTNE]  45.4,22.9 90 top
X7  RESONATOR8M00  [CSTNE]  69.8,22.9 90 top
X8  RESONATOR8M00  [CSTNE]  94.2,22.9 90 top
X9  RESONATOR8M00  [CSTNE]  21,42.3 90 top
X10  RESONATOR8M00  [CSTNE]  45.4,42.3 90 top
X11  RESONATOR8M00  [CSTNE]  69.8,42.3 90 top
X12  RESONATOR8M00  [CSTNE]  94.2,42.3 90 top
X13  RESONATOR8M00  [CSTNE]  21,61.7 90 top
X14  RESONATOR8M00  [CSTNE]  45.4,61.7 90 top
X15  RESONATOR8M00  [CSTNE]  69.8,61.7 90 top
X16  RESONATOR8M00  [CSTNE]  94.2,61.7 90 top
X17  RESONATOR8M00  [CSTNE]  21,81.1 90 top
X18  RESONATOR8M00  [CSTNE]  45.4,81.1 90 top
X19  RESONATOR8M00  [CSTNE]  69.8,81.1 90 top
X20  RESONATOR8M00  [CSTNE]  94.2,81.1 90 top

## Library data of the parts
C1-C120 = resistor
CON1-CON40 = con-jst
DEBUG_A DEBUG_A1-DEBUG_A19 DEBUG_B DEBUG_B1-DEBUG_B19 DEBUG_C DEBUG_C1-DEBUG_C19 DEBUG_D DEBUG_D1-DEBUG_D19 EN EN1-EN19 IRQ IRQ1-IRQ19 SCL SCL1-SCL19 SDA SDA1-SDA19 = testpad
JP1-JP20 = pinhead
RN1-RN40 = resistor-dil; MANF: CAT16-103J4LF; MOUSER: 652-CAT16-103J4LF; OC_FARNELL: unknown; OC_NEWARK: unknown; RS: 522-5412
U1 U4 U7 U10 U13 U16 U19 U22 U25 U28 U31 U34 U37 U40 U43 U46 U49 U52 U55 U58 = ToF-Module; MANF: ATMEGA328P-AU; MOUSER: 556-ATMEGA328P-AU
U2 U5 U8 U11 U14 U17 U20 U23 U26 U29 U32 U35 U38 U41 U44 U47 U50 U53 U56 U59 = ToF-Module; MANF: BSS138DWQ-7; MOUSER: 621-BSS138DWQ-7
U3 U6 U9 U12 U15 U18 U21 U24 U27 U30 U33 U36 U39 U42 U45 U48 U51 U54 U57 U60 = ToF-Module; MANF: MIC5504-2.8YM5-TR; MOUSER: 998-MIC5504-2.8YM5TR
VL1-VL20 = st-vl-sensor; MANF: VL53L0CXV0DH/1; MOUSER: 511-VL53L0CXV0DH/1
X1-X20 = ToF-Module; MANF: CSTNE8M00; MOUSER: 81-CSTNE8M00GH5C000R

## Nets
+2V1: C8.1 C9.1 C10.1 RN3.5 RN3.6 RN3.7 RN3.8 RN4.4 U5.G1 U5.G2 U6.5 VL2.1 VL2.11
+2V2: C14.1 C15.1 C16.1 RN5.5 RN5.6 RN5.7 RN5.8 RN6.4 U8.G1 U8.G2 U9.5 VL3.1 VL3.11
+2V3: C20.1 C21.1 C22.1 RN7.5 RN7.6 RN7.7 RN7.8 RN8.4 U11.G1 U11.G2 U12.5 VL4.1 VL4.11
+2V4: C26.1 C27.1 C28.1 RN9.5 RN9.6 RN9.7 RN9.8 RN10.4 U14.G1 U14.G2 U15.5 VL5.1 VL5.11
+2V5: C32.1 C33.1 C34.1 RN11.5 RN11.6 RN11.7 RN11.8 RN12.4 U17.G1 U17.G2 U18.5 VL6.1 VL6.11
+2V6: C38.1 C39.1 C40.1 RN13.5 RN13.6 RN13.7 RN13.8 RN14.4 U20.G1 U20.G2 U21.5 VL7.1 VL7.11
+2V7: C44.1 C45.1 C46.1 RN15.5 RN15.6 RN15.7 RN15.8 RN16.4 U23.G1 U23.G2 U24.5 VL8.1 VL8.11
+2V8: C2.1 C3.1 C4.1 RN1.5 RN1.6 RN1.7 RN1.8 RN2.4 U2.G1 U2.G2 U3.5 VL1.1 VL1.11
+2V9: C50.1 C51.1 C52.1 RN17.5 RN17.6 RN17.7 RN17.8 RN18.4 U26.G1 U26.G2 U27.5 VL9.1 VL9.11
+2V10: C56.1 C57.1 C58.1 RN19.5 RN19.6 RN19.7 RN19.8 RN20.4 U29.G1 U29.G2 U30.5 VL10.1 VL10.11
+2V11: C62.1 C63.1 C64.1 RN21.5 RN21.6 RN21.7 RN21.8 RN22.4 U32.G1 U32.G2 U33.5 VL11.1 VL11.11
+2V12: C68.1 C69.1 C70.1 RN23.5 RN23.6 RN23.7 RN23.8 RN24.4 U35.G1 U35.G2 U36.5 VL12.1 VL12.11
+2V13: C74.1 C75.1 C76.1 RN25.5 RN25.6 RN25.7 RN25.8 RN26.4 U38.G1 U38.G2 U39.5 VL13.1 VL13.11
+2V14: C80.1 C81.1 C82.1 RN27.5 RN27.6 RN27.7 RN27.8 RN28.4 U41.G1 U41.G2 U42.5 VL14.1 VL14.11
+2V15: C86.1 C87.1 C88.1 RN29.5 RN29.6 RN29.7 RN29.8 RN30.4 U44.G1 U44.G2 U45.5 VL15.1 VL15.11
+2V16: C92.1 C93.1 C94.1 RN31.5 RN31.6 RN31.7 RN31.8 RN32.4 U47.G1 U47.G2 U48.5 VL16.1 VL16.11
+2V17: C98.1 C99.1 C100.1 RN33.5 RN33.6 RN33.7 RN33.8 RN34.4 U50.G1 U50.G2 U51.5 VL17.1 VL17.11
+2V18: C104.1 C105.1 C106.1 RN35.5 RN35.6 RN35.7 RN35.8 RN36.4 U53.G1 U53.G2 U54.5 VL18.1 VL18.11
+2V19: C110.1 C111.1 C112.1 RN37.5 RN37.6 RN37.7 RN37.8 RN38.4 U56.G1 U56.G2 U57.5 VL19.1 VL19.11
+2V20: C116.1 C117.1 C118.1 RN39.5 RN39.6 RN39.7 RN39.8 RN40.4 U59.G1 U59.G2 U60.5 VL20.1 VL20.11
DATA: CON1.3 CON2.3 U1.30 U1.31
DATA1: CON3.3 CON4.3 U4.30 U4.31
DATA2: CON5.3 CON6.3 U7.30 U7.31
DATA3: CON7.3 CON8.3 U10.30 U10.31
DATA4: CON9.3 CON10.3 U13.30 U13.31
DATA5: CON11.3 CON12.3 U16.30 U16.31
DATA6: CON13.3 CON14.3 U19.30 U19.31
DATA7: CON15.3 CON16.3 U22.30 U22.31
DATA8: CON17.3 CON18.3 U25.30 U25.31
DATA9: CON19.3 CON20.3 U28.30 U28.31
DATA10: CON21.3 CON22.3 U31.30 U31.31
DATA11: CON23.3 CON24.3 U34.30 U34.31
DATA12: CON25.3 CON26.3 U37.30 U37.31
DATA13: CON27.3 CON28.3 U40.30 U40.31
DATA14: CON29.3 CON30.3 U43.30 U43.31
DATA15: CON31.3 CON32.3 U46.30 U46.31
DATA16: CON33.3 CON34.3 U49.30 U49.31
DATA17: CON35.3 CON36.3 U52.30 U52.31
DATA18: CON37.3 CON38.3 U55.30 U55.31
DATA19: CON39.3 CON40.3 U58.30 U58.31
EXT_IRQ: IRQ.TP RN2.5 U1.1
EXT_IRQ1: IRQ1.TP RN4.5 U4.1
EXT_IRQ2: IRQ2.TP RN6.5 U7.1
EXT_IRQ3: IRQ3.TP RN8.5 U10.1
EXT_IRQ4: IRQ4.TP RN10.5 U13.1
EXT_IRQ5: IRQ5.TP RN12.5 U16.1
EXT_IRQ6: IRQ6.TP RN14.5 U19.1
EXT_IRQ7: IRQ7.TP RN16.5 U22.1
EXT_IRQ8: IRQ8.TP RN18.5 U25.1
EXT_IRQ9: IRQ9.TP RN20.5 U28.1
EXT_IRQ10: IRQ10.TP RN22.5 U31.1
EXT_IRQ11: IRQ11.TP RN24.5 U34.1
EXT_IRQ12: IRQ12.TP RN26.5 U37.1
EXT_IRQ13: IRQ13.TP RN28.5 U40.1
EXT_IRQ14: IRQ14.TP RN30.5 U43.1
EXT_IRQ15: IRQ15.TP RN32.5 U46.1
EXT_IRQ16: IRQ16.TP RN34.5 U49.1
EXT_IRQ17: IRQ17.TP RN36.5 U52.1
EXT_IRQ18: IRQ18.TP RN38.5 U55.1
EXT_IRQ19: IRQ19.TP RN40.5 U58.1
EXT_XSHUT: EN.TP U1.9
EXT_XSHUT1: EN1.TP U4.9
EXT_XSHUT2: EN2.TP U7.9
EXT_XSHUT3: EN3.TP U10.9
EXT_XSHUT4: EN4.TP U13.9
EXT_XSHUT5: EN5.TP U16.9
EXT_XSHUT6: EN6.TP U19.9
EXT_XSHUT7: EN7.TP U22.9
EXT_XSHUT8: EN8.TP U25.9
EXT_XSHUT9: EN9.TP U28.9
EXT_XSHUT10: EN10.TP U31.9
EXT_XSHUT11: EN11.TP U34.9
EXT_XSHUT12: EN12.TP U37.9
EXT_XSHUT13: EN13.TP U40.9
EXT_XSHUT14: EN14.TP U43.9
EXT_XSHUT15: EN15.TP U46.9
EXT_XSHUT16: EN16.TP U49.9
EXT_XSHUT17: EN17.TP U52.9
EXT_XSHUT18: EN18.TP U55.9
EXT_XSHUT19: EN19.TP U58.9
GND: C1.2 C2.2 C3.2 C4.2 C5.2 C6.2 CON1.1 CON2.1 JP1.6 U1.3 U1.5 U1.21 U3.2 VL1.2 VL1.3 VL1.4 VL1.6 VL1.12 X1.2
GND1: C7.2 C8.2 C9.2 C10.2 C11.2 C12.2 CON3.1 CON4.1 JP2.6 U4.3 U4.5 U4.21 U6.2 VL2.2 VL2.3 VL2.4 VL2.6 VL2.12 X2.2
GND2: C13.2 C14.2 C15.2 C16.2 C17.2 C18.2 CON5.1 CON6.1 JP3.6 U7.3 U7.5 U7.21 U9.2 VL3.2 VL3.3 VL3.4 VL3.6 VL3.12 X3.2
GND3: C19.2 C20.2 C21.2 C22.2 C23.2 C24.2 CON7.1 CON8.1 JP4.6 U10.3 U10.5 U10.21 U12.2 VL4.2 VL4.3 VL4.4 VL4.6 VL4.12 X4.2
GND4: C25.2 C26.2 C27.2 C28.2 C29.2 C30.2 CON9.1 CON10.1 JP5.6 U13.3 U13.5 U13.21 U15.2 VL5.2 VL5.3 VL5.4 VL5.6 VL5.12 X5.2
GND5: C31.2 C32.2 C33.2 C34.2 C35.2 C36.2 CON11.1 CON12.1 JP6.6 U16.3 U16.5 U16.21 U18.2 VL6.2 VL6.3 VL6.4 VL6.6 VL6.12 X6.2
GND6: C37.2 C38.2 C39.2 C40.2 C41.2 C42.2 CON13.1 CON14.1 JP7.6 U19.3 U19.5 U19.21 U21.2 VL7.2 VL7.3 VL7.4 VL7.6 VL7.12 X7.2
GND7: C43.2 C44.2 C45.2 C46.2 C47.2 C48.2 CON15.1 CON16.1 JP8.6 U22.3 U22.5 U22.21 U24.2 VL8.2 VL8.3 VL8.4 VL8.6 VL8.12 X8.2
GND8: C49.2 C50.2 C51.2 C52.2 C53.2 C54.2 CON17.1 CON18.1 JP9.6 U25.3 U25.5 U25.21 U27.2 VL9.2 VL9.3 VL9.4 VL9.6 VL9.12 X9.2
GND9: C55.2 C56.2 C57.2 C58.2 C59.2 C60.2 CON19.1 CON20.1 JP10.6 U28.3 U28.5 U28.21 U30.2 VL10.2 VL10.3 VL10.4 VL10.6 VL10.12 X10.2
GND10: C61.2 C62.2 C63.2 C64.2 C65.2 C66.2 CON21.1 CON22.1 JP11.6 U31.3 U31.5 U31.21 U33.2 VL11.2 VL11.3 VL11.4 VL11.6 VL11.12 X11.2
GND11: C67.2 C68.2 C69.2 C70.2 C71.2 C72.2 CON23.1 CON24.1 JP12.6 U34.3 U34.5 U34.21 U36.2 VL12.2 VL12.3 VL12.4 VL12.6 VL12.12 X12.2
GND12: C73.2 C74.2 C75.2 C76.2 C77.2 C78.2 CON25.1 CON26.1 JP13.6 U37.3 U37.5 U37.21 U39.2 VL13.2 VL13.3 VL13.4 VL13.6 VL13.12 X13.2
GND13: C79.2 C80.2 C81.2 C82.2 C83.2 C84.2 CON27.1 CON28.1 JP14.6 U40.3 U40.5 U40.21 U42.2 VL14.2 VL14.3 VL14.4 VL14.6 VL14.12 X14.2
GND14: C85.2 C86.2 C87.2 C88.2 C89.2 C90.2 CON29.1 CON30.1 JP15.6 U43.3 U43.5 U43.21 U45.2 VL15.2 VL15.3 VL15.4 VL15.6 VL15.12 X15.2
GND15: C91.2 C92.2 C93.2 C94.2 C95.2 C96.2 CON31.1 CON32.1 JP16.6 U46.3 U46.5 U46.21 U48.2 VL16.2 VL16.3 VL16.4 VL16.6 VL16.12 X16.2
GND16: C97.2 C98.2 C99.2 C100.2 C101.2 C102.2 CON33.1 CON34.1 JP17.6 U49.3 U49.5 U49.21 U51.2 VL17.2 VL17.3 VL17.4 VL17.6 VL17.12 X17.2
GND17: C103.2 C104.2 C105.2 C106.2 C107.2 C108.2 CON35.1 CON36.1 JP18.6 U52.3 U52.5 U52.21 U54.2 VL18.2 VL18.3 VL18.4 VL18.6 VL18.12 X18.2
GND18: C109.2 C110.2 C111.2 C112.2 C113.2 C114.2 CON37.1 CON38.1 JP19.6 U55.3 U55.5 U55.21 U57.2 VL19.2 VL19.3 VL19.4 VL19.6 VL19.12 X19.2
GND19: C115.2 C116.2 C117.2 C118.2 C119.2 C120.2 CON39.1 CON40.1 JP20.6 U58.3 U58.5 U58.21 U60.2 VL20.2 VL20.3 VL20.4 VL20.6 VL20.12 X20.2
IRQ: RN1.4 U1.32 VL1.7
IRQ1: RN3.4 U4.32 VL2.7
IRQ2: RN5.4 U7.32 VL3.7
IRQ3: RN7.4 U10.32 VL4.7
IRQ4: RN9.4 U13.32 VL5.7
IRQ5: RN11.4 U16.32 VL6.7
IRQ6: RN13.4 U19.32 VL7.7
IRQ7: RN15.4 U22.32 VL8.7
IRQ8: RN17.4 U25.32 VL9.7
IRQ9: RN19.4 U28.32 VL10.7
IRQ10: RN21.4 U31.32 VL11.7
IRQ11: RN23.4 U34.32 VL12.7
IRQ12: RN25.4 U37.32 VL13.7
IRQ13: RN27.4 U40.32 VL14.7
IRQ14: RN29.4 U43.32 VL15.7
IRQ15: RN31.4 U46.32 VL16.7
IRQ16: RN33.4 U49.32 VL17.7
IRQ17: RN35.4 U52.32 VL18.7
IRQ18: RN37.4 U55.32 VL19.7
IRQ19: RN39.4 U58.32 VL20.7
MISO: JP1.1 U1.16
MISO1: JP2.1 U4.16
MISO2: JP3.1 U7.16
MISO3: JP4.1 U10.16
MISO4: JP5.1 U13.16
MISO5: JP6.1 U16.16
MISO6: JP7.1 U19.16
MISO7: JP8.1 U22.16
MISO8: JP9.1 U25.16
MISO9: JP10.1 U28.16
MISO10: JP11.1 U31.16
MISO11: JP12.1 U34.16
MISO12: JP13.1 U37.16
MISO13: JP14.1 U40.16
MISO14: JP15.1 U43.16
MISO15: JP16.1 U46.16
MISO16: JP17.1 U49.16
MISO17: JP18.1 U52.16
MISO18: JP19.1 U55.16
MISO19: JP20.1 U58.16
MOSI: JP1.4 U1.15
MOSI1: JP2.4 U4.15
MOSI2: JP3.4 U7.15
MOSI3: JP4.4 U10.15
MOSI4: JP5.4 U13.15
MOSI5: JP6.4 U16.15
MOSI6: JP7.4 U19.15
MOSI7: JP8.4 U22.15
MOSI8: JP9.4 U25.15
MOSI9: JP10.4 U28.15
MOSI10: JP11.4 U31.15
MOSI11: JP12.4 U34.15
MOSI12: JP13.4 U37.15
MOSI13: JP14.4 U40.15
MOSI14: JP15.4 U43.15
MOSI15: JP16.4 U46.15
MOSI16: JP17.4 U49.15
MOSI17: JP18.4 U52.15
MOSI18: JP19.4 U55.15
MOSI19: JP20.4 U58.15
N$1: DEBUG_A.TP U1.10
N$2: DEBUG_B.TP U1.11
N$3: RN1.2 U2.S1 VL1.9
N$4: RN1.1 U2.S2 VL1.10
N$5: U1.7 X1.1
N$6: U1.8 X1.3
N$7: DEBUG_C.TP U1.12
N$8: DEBUG_D.TP U1.13
N$9: RN3.2 U5.S1 VL2.9
N$10: RN3.1 U5.S2 VL2.10
N$11: U4.7 X2.1
N$12: U4.8 X2.3
N$13: DEBUG_A1.TP U4.10
N$14: DEBUG_B1.TP U4.11
N$15: DEBUG_C1.TP U4.12
N$16: DEBUG_D1.TP U4.13
N$17: RN5.2 U8.S1 VL3.9
N$18: RN5.1 U8.S2 VL3.10
N$19: U7.7 X3.1
N$20: U7.8 X3.3
N$21: DEBUG_A2.TP U7.10
N$22: DEBUG_B2.TP U7.11
N$23: DEBUG_C2.TP U7.12
N$24: DEBUG_D2.TP U7.13
N$25: RN7.2 U11.S1 VL4.9
N$26: RN7.1 U11.S2 VL4.10
N$27: U10.7 X4.1
N$28: U10.8 X4.3
N$29: DEBUG_A3.TP U10.10
N$30: DEBUG_B3.TP U10.11
N$31: DEBUG_C3.TP U10.12
N$32: DEBUG_D3.TP U10.13
N$33: RN9.2 U14.S1 VL5.9
N$34: RN9.1 U14.S2 VL5.10
N$35: U13.7 X5.1
N$36: U13.8 X5.3
N$37: DEBUG_A4.TP U13.10
N$38: DEBUG_B4.TP U13.11
N$39: DEBUG_C4.TP U13.12
N$40: DEBUG_D4.TP U13.13
N$41: RN11.2 U17.S1 VL6.9
N$42: RN11.1 U17.S2 VL6.10
N$43: U16.7 X6.1
N$44: U16.8 X6.3
N$45: DEBUG_A5.TP U16.10
N$46: DEBUG_B5.TP U16.11
N$47: DEBUG_C5.TP U16.12
N$48: DEBUG_D5.TP U16.13
N$49: RN13.2 U20.S1 VL7.9
N$50: RN13.1 U20.S2 VL7.10
N$51: U19.7 X7.1
N$52: U19.8 X7.3
N$53: DEBUG_A6.TP U19.10
N$54: DEBUG_B6.TP U19.11
N$55: DEBUG_C6.TP U19.12
N$56: DEBUG_D6.TP U19.13
N$57: RN15.2 U23.S1 VL8.9
N$58: RN15.1 U23.S2 VL8.10
N$59: U22.7 X8.1
N$60: U22.8 X8.3
N$61: DEBUG_A7.TP U22.10
N$62: DEBUG_B7.TP U22.11
N$63: DEBUG_C7.TP U22.12
N$64: DEBUG_D7.TP U22.13
N$65: RN17.2 U26.S1 VL9.9
N$66: RN17.1 U26.S2 VL9.10
N$67: U25.7 X9.1
N$68: U25.8 X9.3
N$69: DEBUG_A8.TP U25.10
N$70: DEBUG_B8.TP U25.11
N$71: DEBUG_C8.TP U25.12
N$72: DEBUG_D8.TP U25.13
N$73: RN19.2 U29.S1 VL10.9
N$74: RN19.1 U29.S2 VL10.10
N$75: U28.7 X10.1
N$76: U28.8 X10.3
N$77: DEBUG_A9.TP U28.10
N$78: DEBUG_B9.TP U28.11
N$79: DEBUG_C9.TP U28.12
N$80: DEBUG_D9.TP U28.13
N$81: RN21.2 U32.S1 VL11.9
N$82: RN21.1 U32.S2 VL11.10
N$83: U31.7 X11.1
N$84: U31.8 X11.3
N$85: DEBUG_A10.TP U31.10
N$86: DEBUG_B10.TP U31.11
N$87: DEBUG_C10.TP U31.12
N$88: DEBUG_D10.TP U31.13
N$89: RN23.2 U35.S1 VL12.9
N$90: RN23.1 U35.S2 VL12.10
N$91: U34.7 X12.1
N$92: U34.8 X12.3
N$93: DEBUG_A11.TP U34.10
N$94: DEBUG_B11.TP U34.11
N$95: DEBUG_C11.TP U34.12
N$96: DEBUG_D11.TP U34.13
N$97: RN25.2 U38.S1 VL13.9
N$98: RN25.1 U38.S2 VL13.10
N$99: U37.7 X13.1
N$100: U37.8 X13.3
N$101: DEBUG_A12.TP U37.10
N$102: DEBUG_B12.TP U37.11
N$103: DEBUG_C12.TP U37.12
N$104: DEBUG_D12.TP U37.13
N$105: RN27.2 U41.S1 VL14.9
N$106: RN27.1 U41.S2 VL14.10
N$107: U40.7 X14.1
N$108: U40.8 X14.3
N$109: DEBUG_A13.TP U40.10
N$110: DEBUG_B13.TP U40.11
N$111: DEBUG_C13.TP U40.12
N$112: DEBUG_D13.TP U40.13
N$113: RN29.2 U44.S1 VL15.9
N$114: RN29.1 U44.S2 VL15.10
N$115: U43.7 X15.1
N$116: U43.8 X15.3
N$117: DEBUG_A14.TP U43.10
N$118: DEBUG_B14.TP U43.11
N$119: DEBUG_C14.TP U43.12
N$120: DEBUG_D14.TP U43.13
N$121: RN31.2 U47.S1 VL16.9
N$122: RN31.1 U47.S2 VL16.10
N$123: U46.7 X16.1
N$124: U46.8 X16.3
N$125: DEBUG_A15.TP U46.10
N$126: DEBUG_B15.TP U46.11
N$127: DEBUG_C15.TP U46.12
N$128: DEBUG_D15.TP U46.13
N$129: RN33.2 U50.S1 VL17.9
N$130: RN33.1 U50.S2 VL17.10
N$131: U49.7 X17.1
N$132: U49.8 X17.3
N$133: DEBUG_A16.TP U49.10
N$134: DEBUG_B16.TP U49.11
N$135: DEBUG_C16.TP U49.12
N$136: DEBUG_D16.TP U49.13
N$137: RN35.2 U53.S1 VL18.9
N$138: RN35.1 U53.S2 VL18.10
N$139: U52.7 X18.1
N$140: U52.8 X18.3
N$141: DEBUG_A17.TP U52.10
N$142: DEBUG_B17.TP U52.11
N$143: DEBUG_C17.TP U52.12
N$144: DEBUG_D17.TP U52.13
N$145: RN37.2 U56.S1 VL19.9
N$146: RN37.1 U56.S2 VL19.10
N$147: U55.7 X19.1
N$148: U55.8 X19.3
N$149: DEBUG_A18.TP U55.10
N$150: DEBUG_B18.TP U55.11
N$151: DEBUG_C18.TP U55.12
N$152: DEBUG_D18.TP U55.13
N$153: RN39.2 U59.S1 VL20.9
N$154: RN39.1 U59.S2 VL20.10
N$155: U58.7 X20.1
N$156: U58.8 X20.3
N$157: DEBUG_A19.TP U58.10
N$158: DEBUG_B19.TP U58.11
N$159: DEBUG_C19.TP U58.12
N$160: DEBUG_D19.TP U58.13
RESET: JP1.5 RN2.3 U1.29
RESET1: JP2.5 RN4.3 U4.29
RESET2: JP3.5 RN6.3 U7.29
RESET3: JP4.5 RN8.3 U10.29
RESET4: JP5.5 RN10.3 U13.29
RESET5: JP6.5 RN12.3 U16.29
RESET6: JP7.5 RN14.3 U19.29
RESET7: JP8.5 RN16.3 U22.29
RESET8: JP9.5 RN18.3 U25.29
RESET9: JP10.5 RN20.3 U28.29
RESET10: JP11.5 RN22.3 U31.29
RESET11: JP12.5 RN24.3 U34.29
RESET12: JP13.5 RN26.3 U37.29
RESET13: JP14.5 RN28.3 U40.29
RESET14: JP15.5 RN30.3 U43.29
RESET15: JP16.5 RN32.3 U46.29
RESET16: JP17.5 RN34.3 U49.29
RESET17: JP18.5 RN36.3 U52.29
RESET18: JP19.5 RN38.3 U55.29
RESET19: JP20.5 RN40.3 U58.29
SCK: JP1.3 U1.17
SCK1: JP2.3 U4.17
SCK2: JP3.3 U7.17
SCK3: JP4.3 U10.17
SCK4: JP5.3 U13.17
SCK5: JP6.3 U16.17
SCK6: JP7.3 U19.17
SCK7: JP8.3 U22.17
SCK8: JP9.3 U25.17
SCK9: JP10.3 U28.17
SCK10: JP11.3 U31.17
SCK11: JP12.3 U34.17
SCK12: JP13.3 U37.17
SCK13: JP14.3 U40.17
SCK14: JP15.3 U43.17
SCK15: JP16.3 U46.17
SCK16: JP17.3 U49.17
SCK17: JP18.3 U52.17
SCK18: JP19.3 U55.17
SCK19: JP20.3 U58.17
SCL: RN2.1 SCL.TP U1.28 U2.D2
SCL1: RN4.1 SCL1.TP U4.28 U5.D2
SCL2: RN6.1 SCL2.TP U7.28 U8.D2
SCL3: RN8.1 SCL3.TP U10.28 U11.D2
SCL4: RN10.1 SCL4.TP U13.28 U14.D2
SCL5: RN12.1 SCL5.TP U16.28 U17.D2
SCL6: RN14.1 SCL6.TP U19.28 U20.D2
SCL7: RN16.1 SCL7.TP U22.28 U23.D2
SCL8: RN18.1 SCL8.TP U25.28 U26.D2
SCL9: RN20.1 SCL9.TP U28.28 U29.D2
SCL10: RN22.1 SCL10.TP U31.28 U32.D2
SCL11: RN24.1 SCL11.TP U34.28 U35.D2
SCL12: RN26.1 SCL12.TP U37.28 U38.D2
SCL13: RN28.1 SCL13.TP U40.28 U41.D2
SCL14: RN30.1 SCL14.TP U43.28 U44.D2
SCL15: RN32.1 SCL15.TP U46.28 U47.D2
SCL16: RN34.1 SCL16.TP U49.28 U50.D2
SCL17: RN36.1 SCL17.TP U52.28 U53.D2
SCL18: RN38.1 SCL18.TP U55.28 U56.D2
SCL19: RN40.1 SCL19.TP U58.28 U59.D2
SDA: RN2.2 SDA.TP U1.27 U2.D1
SDA1: RN4.2 SDA1.TP U4.27 U5.D1
SDA2: RN6.2 SDA2.TP U7.27 U8.D1
SDA3: RN8.2 SDA3.TP U10.27 U11.D1
SDA4: RN10.2 SDA4.TP U13.27 U14.D1
SDA5: RN12.2 SDA5.TP U16.27 U17.D1
SDA6: RN14.2 SDA6.TP U19.27 U20.D1
SDA7: RN16.2 SDA7.TP U22.27 U23.D1
SDA8: RN18.2 SDA8.TP U25.27 U26.D1
SDA9: RN20.2 SDA9.TP U28.27 U29.D1
SDA10: RN22.2 SDA10.TP U31.27 U32.D1
SDA11: RN24.2 SDA11.TP U34.27 U35.D1
SDA12: RN26.2 SDA12.TP U37.27 U38.D1
SDA13: RN28.2 SDA13.TP U40.27 U41.D1
SDA14: RN30.2 SDA14.TP U43.27 U44.D1
SDA15: RN32.2 SDA15.TP U46.27 U47.D1
SDA16: RN34.2 SDA16.TP U49.27 U50.D1
SDA17: RN36.2 SDA17.TP U52.27 U53.D1
SDA18: RN38.2 SDA18.TP U55.27 U56.D1
SDA19: RN40.2 SDA19.TP U58.27 U59.D1
VIN: C1.1 C5.1 C6.1 CON1.2 CON2.2 JP1.2 RN2.6 RN2.7 RN2.8 U1.4 U1.6 U1.18 U3.1 U3.3
VIN1: C7.1 C11.1 C12.1 CON3.2 CON4.2 JP2.2 RN4.6 RN4.7 RN4.8 U4.4 U4.6 U4.18 U6.1 U6.3
VIN2: C13.1 C17.1 C18.1 CON5.2 CON6.2 JP3.2 RN6.6 RN6.7 RN6.8 U7.4 U7.6 U7.18 U9.1 U9.3
VIN3: C19.1 C23.1 C24.1 CON7.2 CON8.2 JP4.2 RN8.6 RN8.7 RN8.8 U10.4 U10.6 U10.18 U12.1 U12.3
VIN4: C25.1 C29.1 C30.1 CON9.2 CON10.2 JP5.2 RN10.6 RN10.7 RN10.8 U13.4 U13.6 U13.18 U15.1 U15.3
VIN5: C31.1 C35.1 C36.1 CON11.2 CON12.2 JP6.2 RN12.6 RN12.7 RN12.8 U16.4 U16.6 U16.18 U18.1 U18.3
VIN6: C37.1 C41.1 C42.1 CON13.2 CON14.2 JP7.2 RN14.6 RN14.7 RN14.8 U19.4 U19.6 U19.18 U21.1 U21.3
VIN7: C43.1 C47.1 C48.1 CON15.2 CON16.2 JP8.2 RN16.6 RN16.7 RN16.8 U22.4 U22.6 U22.18 U24.1 U24.3
VIN8: C49.1 C53.1 C54.1 CON17.2 CON18.2 JP9.2 RN18.6 RN18.7 RN18.8 U25.4 U25.6 U25.18 U27.1 U27.3
VIN9: C55.1 C59.1 C60.1 CON19.2 CON20.2 JP10.2 RN20.6 RN20.7 RN20.8 U28.4 U28.6 U28.18 U30.1 U30.3
VIN10: C61.1 C65.1 C66.1 CON21.2 CON22.2 JP11.2 RN22.6 RN22.7 RN22.8 U31.4 U31.6 U31.18 U33.1 U33.3
VIN11: C67.1 C71.1 C72.1 CON23.2 CON24.2 JP12.2 RN24.6 RN24.7 RN24.8 U34.4 U34.6 U34.18 U36.1 U36.3
VIN12: C73.1 C77.1 C78.1 CON25.2 CON26.2 JP13.2 RN26.6 RN26.7 RN26.8 U37.4 U37.6 U37.18 U39.1 U39.3
VIN13: C79.1 C83.1 C84.1 CON27.2 CON28.2 JP14.2 RN28.6 RN28.7 RN28.8 U40.4 U40.6 U40.18 U42.1 U42.3
VIN14: C85.1 C89.1 C90.1 CON29.2 CON30.2 JP15.2 RN30.6 RN30.7 RN30.8 U43.4 U43.6 U43.18 U45.1 U45.3
VIN15: C91.1 C95.1 C96.1 CON31.2 CON32.2 JP16.2 RN32.6 RN32.7 RN32.8 U46.4 U46.6 U46.18 U48.1 U48.3
VIN16: C97.1 C101.1 C102.1 CON33.2 CON34.2 JP17.2 RN34.6 RN34.7 RN34.8 U49.4 U49.6 U49.18 U51.1 U51.3
VIN17: C103.1 C107.1 C108.1 CON35.2 CON36.2 JP18.2 RN36.6 RN36.7 RN36.8 U52.4 U52.6 U52.18 U54.1 U54.3
VIN18: C109.1 C113.1 C114.1 CON37.2 CON38.2 JP19.2 RN38.6 RN38.7 RN38.8 U55.4 U55.6 U55.18 U57.1 U57.3
VIN19: C115.1 C119.1 C120.1 CON39.2 CON40.2 JP20.2 RN40.6 RN40.7 RN40.8 U58.4 U58.6 U58.18 U60.1 U60.3
XSHUT: RN1.3 U1.2 VL1.5
XSHUT1: RN3.3 U4.2 VL2.5
XSHUT2: RN5.3 U7.2 VL3.5
XSHUT3: RN7.3 U10.2 VL4.5
XSHUT4: RN9.3 U13.2 VL5.5
XSHUT5: RN11.3 U16.2 VL6.5
XSHUT6: RN13.3 U19.2 VL7.5
XSHUT7: RN15.3 U22.2 VL8.5
XSHUT8: RN17.3 U25.2 VL9.5
XSHUT9: RN19.3 U28.2 VL10.5
XSHUT10: RN21.3 U31.2 VL11.5
XSHUT11: RN23.3 U34.2 VL12.5
XSHUT12: RN25.3 U37.2 VL13.5
XSHUT13: RN27.3 U40.2 VL14.5
XSHUT14: RN29.3 U43.2 VL15.5
XSHUT15: RN31.3 U46.2 VL16.5
XSHUT16: RN33.3 U49.2 VL17.5
XSHUT17: RN35.3 U52.2 VL18.5
XSHUT18: RN37.3 U55.2 VL19.5
XSHUT19: RN39.3 U58.2 VL20.5

## Tracks (layer width: path | path; a pad name or v marks a point on that pad's centre or on a via)
+2V1
  Top 0.152: 45.7,11.4 44.9,11.4 44.6,11.1 VL2.11 43.32,10.6 RN3.5 RN3.6 RN3.7 RN3.8 40,9.68 40,8.2 39.3,7.5 U5.G2 U5.G1 | 45.7,11.4 45.9,11.4 46.2,11.1 VL2.1 | 45.7,12 45.7,12.95 C10.1 C9.1 | 45.7,12 45.7,11.4 | U6.5 41.85,12.8 | 41.85,12.8 41.85,12.1 C8.1 45.7,12 | RN4.4 38.97,12.8 41.85,12.8
+2V2
  Top 0.152: 70.1,11.4 69.3,11.4 69,11.1 VL3.11 67.72,10.6 RN5.5 RN5.6 RN5.7 RN5.8 64.4,9.68 64.4,8.2 63.7,7.5 U8.G2 U8.G1 | 70.1,11.4 70.3,11.4 70.6,11.1 VL3.1 | 70.1,12 70.1,12.95 C16.1 C15.1 | 70.1,12 70.1,11.4 | U9.5 66.25,12.8 | 66.25,12.8 66.25,12.1 C14.1 70.1,12 | RN6.4 63.38,12.8 66.25,12.8
+2V3
  Top 0.152: 94.5,11.4 93.7,11.4 93.4,11.1 VL4.11 92.12,10.6 RN7.5 RN7.6 RN7.7 RN7.8 88.8,9.68 88.8,8.2 88.1,7.5 U11.G2 U11.G1 | 94.5,11.4 94.7,11.4 95,11.1 VL4.1 | 94.5,12 94.5,12.95 C22.1 C21.1 | 94.5,12 94.5,11.4 | U12.5 90.65,12.8 | 90.65,12.8 90.65,12.1 C20.1 94.5,12 | RN8.4 87.77,12.8 90.65,12.8
+2V4
  Top 0.152: 21.3,30.8 20.5,30.8 20.2,30.5 VL5.11 18.93,30 RN9.5 RN9.6 RN9.7 RN9.8 15.6,29.07 15.6,27.6 14.9,26.9 U14.G2 U14.G1 | 21.3,30.8 21.5,30.8 21.8,30.5 VL5.1 | 21.3,31.4 21.3,32.35 C28.1 C27.1 | 21.3,31.4 21.3,30.8 | U15.5 17.45,32.2 | 17.45,32.2 17.45,31.5 C26.1 21.3,31.4 | RN10.4 14.58,32.2 17.45,32.2
+2V5
  Top 0.152: 45.7,30.8 44.9,30.8 44.6,30.5 VL6.11 43.32,30 RN11.5 RN11.6 RN11.7 RN11.8 40,29.07 40,27.6 39.3,26.9 U17.G2 U17.G1 | 45.7,30.8 45.9,30.8 46.2,30.5 VL6.1 | 45.7,31.4 45.7,32.35 C34.1 C33.1 | 45.7,31.4 45.7,30.8 | U18.5 41.85,32.2 | 41.85,32.2 41.85,31.5 C32.1 45.7,31.4 | RN12.4 38.97,32.2 41.85,32.2
+2V6
  Top 0.152: 70.1,30.8 69.3,30.8 69,30.5 VL7.11 67.72,30 RN13.5 RN13.6 RN13.7 RN13.8 64.4,29.07 64.4,27.6 63.7,26.9 U20.G2 U20.G1 | 70.1,30.8 70.3,30.8 70.6,30.5 VL7.1 | 70.1,31.4 70.1,32.35 C40.1 C39.1 | 70.1,31.4 70.1,30.8 | U21.5 66.25,32.2 | 66.25,32.2 66.25,31.5 C38.1 70.1,31.4 | RN14.4 63.38,32.2 66.25,32.2
+2V7
  Top 0.152: 94.5,30.8 93.7,30.8 93.4,30.5 VL8.11 92.12,30 RN15.5 RN15.6 RN15.7 RN15.8 88.8,29.07 88.8,27.6 88.1,26.9 U23.G2 U23.G1 | 94.5,30.8 94.7,30.8 95,30.5 VL8.1 | 94.5,31.4 94.5,32.35 C46.1 C45.1 | 94.5,31.4 94.5,30.8 | U24.5 90.65,32.2 | 90.65,32.2 90.65,31.5 C44.1 94.5,31.4 | RN16.4 87.77,32.2 90.65,32.2
+2V8
  Top 0.152: 21.3,11.4 20.5,11.4 20.2,11.1 VL1.11 18.93,10.6 RN1.5 RN1.6 RN1.7 RN1.8 15.6,9.68 15.6,8.2 14.9,7.5 U2.G2 U2.G1 | 21.3,11.4 21.5,11.4 21.8,11.1 VL1.1 | 21.3,12 21.3,12.95 C4.1 C3.1 | 21.3,12 21.3,11.4 | U3.5 17.45,12.8 | 17.45,12.8 17.45,12.1 C2.1 21.3,12 | RN2.4 14.58,12.8 17.45,12.8
+2V9
  Top 0.152: 21.3,50.2 20.5,50.2 20.2,49.9 VL9.11 18.93,49.4 RN17.5 RN17.6 RN17.7 RN17.8 15.6,48.47 15.6,47 14.9,46.3 U26.G2 U26.G1 | 21.3,50.2 21.5,50.2 21.8,49.9 VL9.1 | 21.3,50.8 21.3,51.75 C52.1 C51.1 | 21.3,50.8 21.3,50.2 | U27.5 17.45,51.6 | 17.45,51.6 17.45,50.9 C50.1 21.3,50.8 | RN18.4 14.58,51.6 17.45,51.6
+2V10
  Top 0.152: 45.7,50.2 44.9,50.2 44.6,49.9 VL10.11 43.32,49.4 RN19.5 RN19.6 RN19.7 RN19.8 40,48.47 40,47 39.3,46.3 U29.G2 U29.G1 | 45.7,50.2 45.9,50.2 46.2,49.9 VL10.1 | 45.7,50.8 45.7,51.75 C58.1 C57.1 | 45.7,50.8 45.7,50.2 | U30.5 41.85,51.6 | 41.85,51.6 41.85,50.9 C56.1 45.7,50.8 | RN20.4 38.97,51.6 41.85,51.6
+2V11
  Top 0.152: 70.1,50.2 69.3,50.2 69,49.9 VL11.11 67.72,49.4 RN21.5 RN21.6 RN21.7 RN21.8 64.4,48.47 64.4,47 63.7,46.3 U32.G2 U32.G1 | 70.1,50.2 70.3,50.2 70.6,49.9 VL11.1 | 70.1,50.8 70.1,51.75 C64.1 C63.1 | 70.1,50.8 70.1,50.2 | U33.5 66.25,51.6 | 66.25,51.6 66.25,50.9 C62.1 70.1,50.8 | RN22.4 63.38,51.6 66.25,51.6
+2V12
  Top 0.152: 94.5,50.2 93.7,50.2 93.4,49.9 VL12.11 92.12,49.4 RN23.5 RN23.6 RN23.7 RN23.8 88.8,48.47 88.8,47 88.1,46.3 U35.G2 U35.G1 | 94.5,50.2 94.7,50.2 95,49.9 VL12.1 | 94.5,50.8 94.5,51.75 C70.1 C69.1 | 94.5,50.8 94.5,50.2 | U36.5 90.65,51.6 | 90.65,51.6 90.65,50.9 C68.1 94.5,50.8 | RN24.4 87.77,51.6 90.65,51.6
+2V13
  Top 0.152: 21.3,69.6 20.5,69.6 20.2,69.3 VL13.11 18.93,68.8 RN25.5 RN25.6 RN25.7 RN25.8 15.6,67.88 15.6,66.4 14.9,65.7 U38.G2 U38.G1 | 21.3,69.6 21.5,69.6 21.8,69.3 VL13.1 | 21.3,70.2 21.3,71.15 C76.1 C75.1 | 21.3,70.2 21.3,69.6 | U39.5 17.45,71 | 17.45,71 17.45,70.3 C74.1 21.3,70.2 | RN26.4 14.58,71 17.45,71
+2V14
  Top 0.152: 45.7,69.6 44.9,69.6 44.6,69.3 VL14.11 43.32,68.8 RN27.5 RN27.6 RN27.7 RN27.8 40,67.88 40,66.4 39.3,65.7 U41.G2 U41.G1 | 45.7,69.6 45.9,69.6 46.2,69.3 VL14.1 | 45.7,70.2 45.7,71.15 C82.1 C81.1 | 45.7,70.2 45.7,69.6 | U42.5 41.85,71 | 41.85,71 41.85,70.3 C80.1 45.7,70.2 | RN28.4 38.97,71 41.85,71
+2V15
  Top 0.152: 70.1,69.6 69.3,69.6 69,69.3 VL15.11 67.72,68.8 RN29.5 RN29.6 RN29.7 RN29.8 64.4,67.88 64.4,66.4 63.7,65.7 U44.G2 U44.G1 | 70.1,69.6 70.3,69.6 70.6,69.3 VL15.1 | 70.1,70.2 70.1,71.15 C88.1 C87.1 | 70.1,70.2 70.1,69.6 | U45.5 66.25,71 | 66.25,71 66.25,70.3 C86.1 70.1,70.2 | RN30.4 63.38,71 66.25,71
+2V16
  Top 0.152: 94.5,69.6 93.7,69.6 93.4,69.3 VL16.11 92.12,68.8 RN31.5 RN31.6 RN31.7 RN31.8 88.8,67.88 88.8,66.4 88.1,65.7 U47.G2 U47.G1 | 94.5,69.6 94.7,69.6 95,69.3 VL16.1 | 94.5,70.2 94.5,71.15 C94.1 C93.1 | 94.5,70.2 94.5,69.6 | U48.5 90.65,71 | 90.65,71 90.65,70.3 C92.1 94.5,70.2 | RN32.4 87.77,71 90.65,71
+2V17
  Top 0.152: 21.3,89 20.5,89 20.2,88.7 VL17.11 18.93,88.2 RN33.5 RN33.6 RN33.7 RN33.8 15.6,87.27 15.6,85.8 14.9,85.1 U50.G2 U50.G1 | 21.3,89 21.5,89 21.8,88.7 VL17.1 | 21.3,89.6 21.3,90.55 C100.1 C99.1 | 21.3,89.6 21.3,89 | U51.5 17.45,90.4 | 17.45,90.4 17.45,89.7 C98.1 21.3,89.6 | RN34.4 14.58,90.4 17.45,90.4
+2V18
  Top 0.152: 45.7,89 44.9,89 44.6,88.7 VL18.11 43.32,88.2 RN35.5 RN35.6 RN35.7 RN35.8 40,87.27 40,85.8 39.3,85.1 U53.G2 U53.G1 | 45.7,89 45.9,89 46.2,88.7 VL18.1 | 45.7,89.6 45.7,90.55 C106.1 C105.1 | 45.7,89.6 45.7,89 | U54.5 41.85,90.4 | 41.85,90.4 41.85,89.7 C104.1 45.7,89.6 | RN36.4 38.97,90.4 41.85,90.4
+2V19
  Top 0.152: 70.1,89 69.3,89 69,88.7 VL19.11 67.72,88.2 RN37.5 RN37.6 RN37.7 RN37.8 64.4,87.27 64.4,85.8 63.7,85.1 U56.G2 U56.G1 | 70.1,89 70.3,89 70.6,88.7 VL19.1 | 70.1,89.6 70.1,90.55 C112.1 C111.1 | 70.1,89.6 70.1,89 | U57.5 66.25,90.4 | 66.25,90.4 66.25,89.7 C110.1 70.1,89.6 | RN38.4 63.38,90.4 66.25,90.4
+2V20
  Top 0.152: 94.5,89 93.7,89 93.4,88.7 VL20.11 92.12,88.2 RN39.5 RN39.6 RN39.7 RN39.8 88.8,87.27 88.8,85.8 88.1,85.1 U59.G2 U59.G1 | 94.5,89 94.7,89 95,88.7 VL20.1 | 94.5,89.6 94.5,90.55 C118.1 C117.1 | 94.5,89.6 94.5,89 | U60.5 90.65,90.4 | 90.65,90.4 90.65,89.7 C116.1 94.5,89.6 | RN40.4 87.77,90.4 90.65,90.4
DATA
  Bottom 0.152: CON1.3 5.9,6.25 6.6,6.95 6.6,10.01 6.66,10.07 6.66,10.53 6.6,10.59 6.6,12.21 7.16,12.77 7.16,13.6 | CON2.3 5.95,14.25 6.6,13.6 7.16,13.6 | 18.2,14.6 U1.30 | U1.31 19,14.5 18.9,14.6 18.2,14.6 | 18.2,14.6 11.7,14.6 10.7,13.6 7.16,13.6
DATA1
  Bottom 0.152: CON3.3 30.3,6.25 31,6.95 31,10.01 31.06,10.07 31.06,10.53 31,10.59 31,12.21 31.56,12.77 31.56,13.6 | CON4.3 30.35,14.25 31,13.6 31.56,13.6 | 42.6,14.6 U4.30 | U4.31 43.4,14.5 43.3,14.6 42.6,14.6 | 42.6,14.6 36.1,14.6 35.1,13.6 31.56,13.6
DATA2
  Bottom 0.152: CON5.3 54.7,6.25 55.4,6.95 55.4,10.01 55.46,10.07 55.46,10.53 55.4,10.59 55.4,12.21 55.96,12.77 55.96,13.6 | CON6.3 54.75,14.25 55.4,13.6 55.96,13.6 | 67,14.6 U7.30 | U7.31 67.8,14.5 67.7,14.6 67,14.6 | 67,14.6 60.5,14.6 59.5,13.6 55.96,13.6
DATA3
  Bottom 0.152: CON7.3 79.1,6.25 79.8,6.95 79.8,10.01 79.86,10.07 79.86,10.53 79.8,10.59 79.8,12.21 80.36,12.77 80.36,13.6 | CON8.3 79.15,14.25 79.8,13.6 80.36,13.6 | 91.4,14.6 U10.30 | U10.31 92.2,14.5 92.1,14.6 91.4,14.6 | 91.4,14.6 84.9,14.6 83.9,13.6 80.36,13.6
DATA4
  Bottom 0.152: CON9.3 5.9,25.65 6.6,26.35 6.6,29.41 6.66,29.47 6.66,29.93 6.6,29.99 6.6,31.61 7.16,32.17 7.16,33 | CON10.3 5.95,33.65 6.6,33 7.16,33 | 18.2,34 U13.30 | U13.31 19,33.9 18.9,34 18.2,34 | 18.2,34 11.7,34 10.7,33 7.16,33
DATA5
  Bottom 0.152: CON11.3 30.3,25.65 31,26.35 31,29.41 31.06,29.47 31.06,29.93 31,29.99 31,31.61 31.56,32.17 31.56,33 | CON12.3 30.35,33.65 31,33 31.56,33 | 42.6,34 U16.30 | U16.31 43.4,33.9 43.3,34 42.6,34 | 42.6,34 36.1,34 35.1,33 31.56,33
DATA6
  Bottom 0.152: CON13.3 54.7,25.65 55.4,26.35 55.4,29.41 55.46,29.47 55.46,29.93 55.4,29.99 55.4,31.61 55.96,32.17 55.96,33 | CON14.3 54.75,33.65 55.4,33 55.96,33 | 67,34 U19.30 | U19.31 67.8,33.9 67.7,34 67,34 | 67,34 60.5,34 59.5,33 55.96,33
DATA7
  Bottom 0.152: CON15.3 79.1,25.65 79.8,26.35 79.8,29.41 79.86,29.47 79.86,29.93 79.8,29.99 79.8,31.61 80.36,32.17 80.36,33 | CON16.3 79.15,33.65 79.8,33 80.36,33 | 91.4,34 U22.30 | U22.31 92.2,33.9 92.1,34 91.4,34 | 91.4,34 84.9,34 83.9,33 80.36,33
DATA8